# Allegro board XR871_EVB_MAIN_BRD_V1_1-20170606.brd
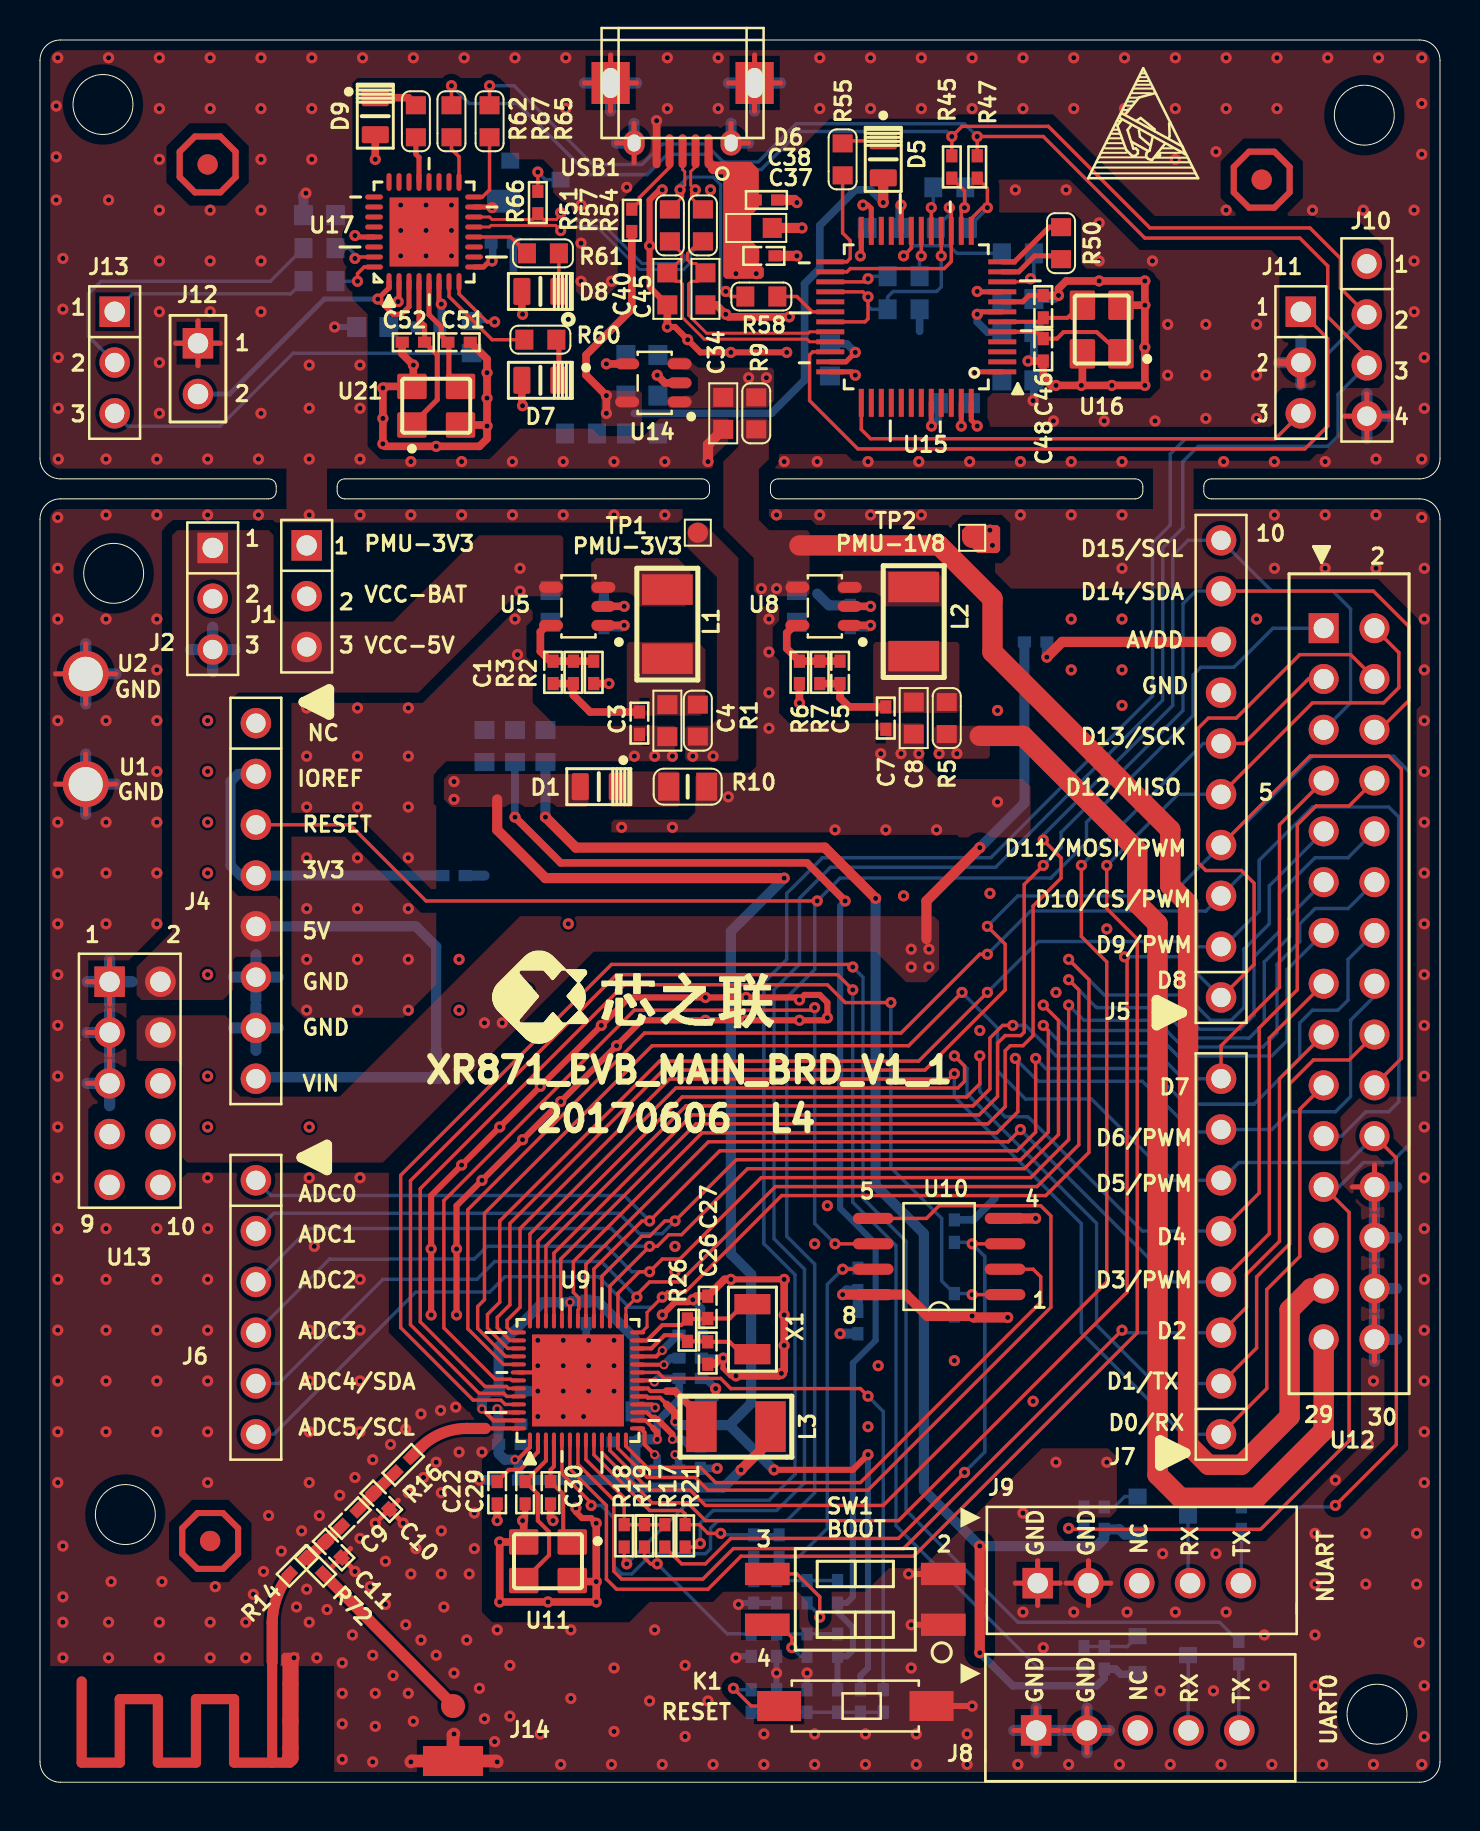
[diagram p0: board, top side]
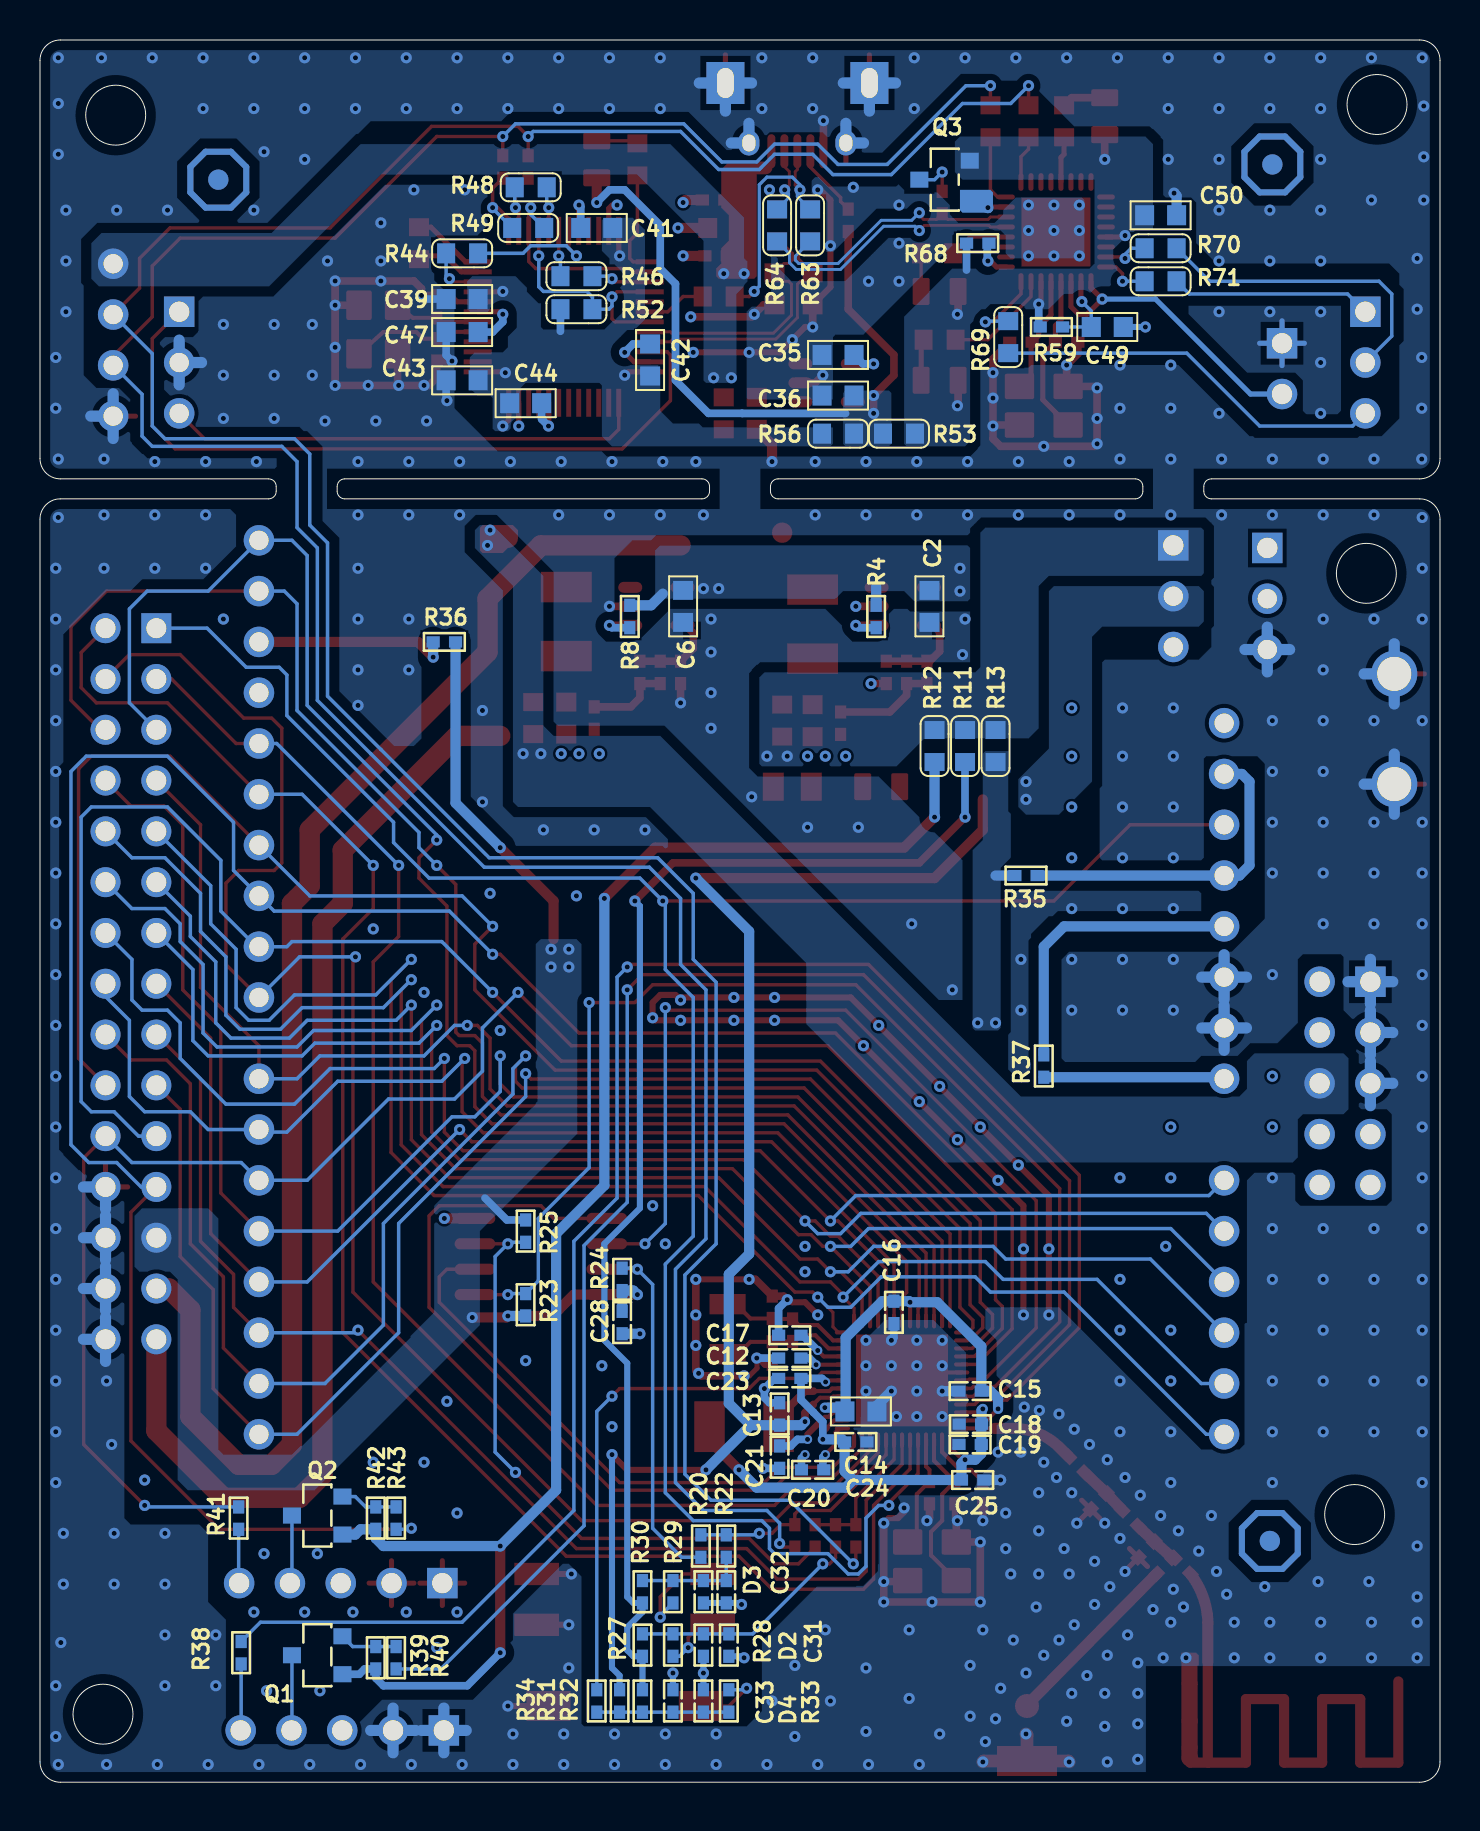
[diagram p1: board, bottom side, seen from below]

Outline 70 x 87.12 mm; copper layers: TOP, GND02, POWER03, BOTTOM. Coordinates in mm from the lower left corner of the outline.
Outline path: circle c3.15,83.9 r1.5 ; circle c3.68,60.45 r1.5 ; circle c4.27,13.39 r1.5 ; circle c66.22,83.36 r1.5 ; circle c66.85,3.4 r1.5 ; 0,86.11 arc(0.3,86.82) 1.02,87.12 68.99,87.12 arc(69.7,86.82) 70,86.11 70,66.19 arc(69.7,65.47) 68.99,65.18 58.57,65.18 arc(58.3,65.06) 58.19,64.8 58.19,64.56 arc(58.3,64.29) 58.57,64.18 68.99,64.18 arc(69.7,63.88) 70,63.16 70,1.02 arc(69.7,0.3) 68.99,0 1.02,0 arc(0.3,0.3) 0,1.02 0,63.16 arc(0.3,63.88) 1.02,64.18 11.43,64.18 arc(11.7,64.29) 11.81,64.56 11.81,64.8 arc(11.7,65.06) 11.43,65.18 1.02,65.18 arc(0.3,65.47) 0,66.19 0,86.11 ; 14.86,64.8 arc(14.97,65.06) 15.24,65.18 33.1,65.18 arc(33.37,65.06) 33.48,64.8 33.48,64.56 arc(33.37,64.29) 33.1,64.18 15.24,64.18 arc(14.97,64.29) 14.86,64.56 14.86,64.8 ; 36.53,64.8 36.53,64.56 arc(36.64,64.29) 36.91,64.18 54.76,64.18 arc(55.03,64.29) 55.14,64.56 55.14,64.8 arc(55.03,65.06) 54.76,65.18 36.91,65.18 arc(36.64,65.06) 36.53,64.8

## Design rules (mm)
net group DIFFPAIR0: nets DUSBD+ DUSBD-
net group DIFFPAIR1: nets USBD+ USBD-
net group DIFFPAIR2: nets N16821081 N16821084

## Placement (name value [footprint] x y rotation side)
C1  47pF  [C0402]  25.65 55.5 90 top
C2  10uF  [C0603]  25.53 58.8 270 bottom
C3  104  [C0402]  29.97 52.96 270 top
C4  10uF  [C0603]  31.37 53.09 270 top
C5  47pF  [C0402]  40.01 55.5 90 top
C6  10uF  [C0603]  37.85 58.8 270 bottom
C7  104  [C0402]  42.29 53.21 270 top
C8  10uF  [C0603]  43.69 53.21 270 top
C9  0R  [C0402]  15.49 13.21 225 top
C10  NC  [C0402]  17.07 14.05 135 top
C11  NC  [C0402]  14.68 11.63 135 top
C12  4.7uF  [C0402]  32.51 21.21 180 bottom
C13  4.7uF  [C0402]  33.02 18.41 90 bottom
C14  10uF  [C0603]  28.96 18.54 180 bottom
C15  104  [C0402]  23.5 19.56 180 bottom
C16  104  [C0402]  27.3 23.5 270 bottom
C17  1uF  [C0402]  32.51 22.35 180 bottom
C18  104  [C0402]  23.48 17.91 180 bottom
C19  104  [C0402]  23.5 16.89 180 bottom
C20  4.7uF  [C0402]  31.37 15.62 180 bottom
C21  4.7uF  [C0402]  33.02 16.26 90 bottom
C22  1uF  [C0402]  22.86 14.48 90 top
C23  4.7uF  [C0402]  32.51 20.19 0 bottom
C24  NC-4.7uF  [C0402]  29.21 17.02 0 bottom
C25  NC-22pF  [C0402]  23.37 15.11 0 bottom
C26  18pF  [C0402]  33.39 23.75 90 top
C27  18pF  [C0402]  33.39 21.46 270 top
C28  104  [C0402]  40.89 22.99 270 bottom
C29  10pF  [C0402]  24.26 14.48 90 top
C30  10pF  [C0402]  25.53 14.48 270 top
C31  104  [C0402]  35.56 6.86 90 bottom
C32  104  [C0402]  35.69 9.53 90 bottom
C33  104  [C0402]  38.35 4.06 270 bottom
C34  105  [C0603]  34.16 68.45 270 top
C35  104  [C0603]  30.1 71.37 0 bottom
C36  105  [C0603]  30.1 69.34 0 bottom
C37  104  [C0402]  36.2 76.33 180 top
C38  10uF  [C0603]  35.81 77.72 180 top
C39  104  [C0603]  48.9 74.17 0 bottom
C40  NC-22p  [C0603]  31.37 74.68 270 top
C41  104  [C0603]  42.16 77.72 0 bottom
C42  104  [C0603]  39.5 71.12 90 bottom
C43  104  [C0603]  48.9 70.1 0 bottom
C44  104  [C0603]  45.72 68.96 180 bottom
C45  NC-22p  [C0603]  33.27 74.68 90 top
C46  10pF  [C0402]  50.16 73.79 270 top
C47  104  [C0603]  48.9 72.52 0 bottom
C48  10pF  [C0402]  50.16 71.63 270 top
C49  100nF  [C0603]  16.64 72.77 180 bottom
C50  105  [C0603]  13.97 78.36 180 bottom
C51  10pF  [C0402]  20.95 72.01 180 top
C52  10pF  [C0402]  18.67 72.01 180 top
D1  RED  [LED0805]  27.94 49.78 180 top
D2  ESD9B5VL-2/TR  [C0402]  36.83 6.86 270 bottom
D3  ESD9B5VL-2/TR  [C0402]  36.83 9.53 270 bottom
D4  ESD9B5VL-2/TR  [C0402]  36.83 4.06 90 bottom
D5  RED  [LED0805]  42.16 81.15 270 top
D6  AU0511P1  [R0402]  36.32 79.12 0 top
D7  RED  [LED0805]  25.02 70.1 180 top
D8  RED  [LED0805]  25.02 74.55 180 top
D9  RED  [LED0805]  16.76 83.31 270 top
J1  VCC-5V  [SIP-3]  13.34 59.31 0 top
J2  SIP3  [SIP-3]  8.64 59.18 0 top
J4  CON8  [SIP-8]  10.79 42.8 0 top
J5  CON10  [SIP-10]  59.05 58.29 180 top
J6  CON6  [SIP-6]  10.79 11.05 0 top
J7  CON8  [SIP-8]  59.05 27.56 180 top
J8  -  [CON5]  59.97 2.59 180 top
J9  -  [CON5]  60.05 9.96 180 top
J10  SWOUT  [SIP-4]  66.34 73.39 0 top
J11  SWD  [SIP-3]  63.04 70.99 0 top
J12  -  [SIP-2]  7.9 70.69 0 top
J13  TGT  [SIP-3]  3.73 70.99 0 top
J14  ANT  [ANT2]  20.65 2.31 0 top
K1  -  [KEY-2]  36.32 3.81 270 top
L1  2.2uH-1.5A DCR<0.1R  [CD32]  31.37 57.91 90 top
L2  2.2uH-1.5A DCR<0.1R  [CD32]  43.69 58.04 90 top
L3  3.3uH-1.0A DCR<0.2R  [CD32]  34.8 17.78 180 top
NOREF  -  [unnamed]  8.51 12.06 0 top
NOREF#2  -  [#2]  67.39 82.43 0 top
NOREF#3  -  [#2]  -7 2 0 top
NOREF#4  -  [#2]  3.17 60.33 0 top
NOREF#5  -  [#2]  4.83 13.59 0 top
NOREF#6  -  [unnamed]  61.09 80.14 0 top
NOREF#7  -  [unnamed]  8.38 80.9 0 top
NOREF#8  -  [#2]  2.57 82.52 0 top
NOREF#9  -  [#2]  66.93 3.3 0 top
NOREF#10  -  [#2]  0 74.5 0 top
NOREF#11  -  [#2]  3.68 0 90 top
NOREF#12  -  [unnamed]  8.51 12.06 180 bottom
NOREF#13  -  [unnamed]  61.09 80.14 180 bottom
NOREF#14  -  [unnamed]  8.38 80.9 180 bottom
Q1  BSN20  [SOT-23]  56.13 6.35 0 bottom
Q2  BSN20  [SOT-23]  56.13 13.34 0 bottom
Q3  BSS84  [SOT-23]  24.77 80.14 0 bottom
R1  0R  [R0603]  32.89 53.09 270 top
R2  22K-1%  [R0402]  27.69 55.5 270 top
R3  100K-1%  [R0402]  26.67 55.5 90 top
R4  100K  [R0402]  28.19 58.29 270 bottom
R5  0R  [R0603]  45.34 53.21 270 top
R6  10K-1%  [R0402]  37.97 55.5 270 top
R7  20K-1%  [R0402]  38.99 55.5 90 top
R8  100K  [R0402]  40.51 58.29 270 bottom
R9  0R  [R0603]  35.81 68.45 270 top
R10  1.5K  [R0805]  32.38 49.78 180 top
R11  0R  [R0603]  23.75 51.82 270 bottom
R12  0R  [R0603]  25.27 51.82 270 bottom
R13  0R  [R0603]  22.23 51.82 270 bottom
R14  0R  [R0402]  12.88 10.82 225 top
R16  0R-NC  [R0402]  18.16 15.88 225 top
R17  0R-NC  [R0402]  31.24 12.32 270 top
R18  NC-0R  [R0402]  29.21 12.32 270 top
R19  0R  [R0402]  30.23 12.32 270 top
R20  0R-NC  [R0402]  36.96 11.81 270 bottom
R21  NC-0R  [R0402]  32.26 12.32 270 top
R22  0R  [R0402]  35.69 11.81 270 bottom
R23  10K  [R0402]  45.72 23.88 270 bottom
R24  10K  [R0402]  40.89 25.15 270 bottom
R25  10K  [R0402]  45.72 27.56 90 bottom
R26  NC-10M  [R0402]  32.37 22.61 90 top
R27  10K  [R0402]  39.88 6.86 90 bottom
R28  0R  [R0402]  38.35 6.86 270 bottom
R29  0R  [R0402]  38.35 9.53 90 bottom
R30  10K  [R0402]  39.88 9.53 270 bottom
R31  10K  [R0402]  41.02 4.06 270 bottom
R32  NC-10K  [R0402]  39.88 4.06 270 bottom
R33  0R  [R0402]  35.56 4.06 90 bottom
R34  0R-NC  [R0402]  42.16 4.06 270 bottom
R35  0R  [R0402]  20.7 45.34 0 bottom
R36  0R  [R0402]  49.78 57.02 180 bottom
R37  0R  [R0402]  19.81 35.81 90 bottom
R38  0R  [R0402]  59.94 6.48 270 bottom
R39  10K  [R0402]  53.21 6.22 90 bottom
R40  0R  [R0402]  52.2 6.22 90 bottom
R41  0R  [R0402]  60.07 13.21 270 bottom
R42  10K  [R0402]  53.21 13.21 90 bottom
R43  0R  [R0402]  52.2 13.21 90 bottom
R44  100R  [R0603]  48.9 76.45 0 bottom
R45  0R-NC  [R0402]  45.59 80.77 270 top
R46  100R  [R0603]  43.18 75.31 180 bottom
R47  0R-NC  [R0402]  46.86 80.77 270 top
R48  100R  [R0603]  45.47 79.76 180 bottom
R49  100R  [R0603]  45.59 77.72 180 bottom
R50  100R  [R0603]  51.05 76.96 270 top
R51  47K  [R0402]  29.59 78.11 270 top
R52  10K  [R0603]  43.18 73.66 0 bottom
R53  NC-0R  [R0603]  27.05 67.44 180 bottom
R54  22R  [R0603]  33.15 77.85 270 top
R55  1K  [R0603]  40.13 81.15 90 top
R56  0R-NC  [R0603]  30.1 67.44 0 bottom
R57  22R  [R0603]  31.5 77.85 270 top
R58  1K5  [R0603]  36.07 74.3 0 top
R59  10K  [R0402]  19.43 72.77 180 bottom
R60  1K  [R0603]  25.02 72.14 0 top
R61  1K  [R0603]  25.15 76.45 0 top
R62  1K  [R0603]  18.8 83.06 90 top
R63  NC-33R  [R0603]  31.5 77.85 270 bottom
R64  NC-33R  [R0603]  33.15 77.85 270 bottom
R65  NC-470  [R0603]  22.48 83.06 90 top
R66  1K5  [R0402]  24.89 78.99 90 top
R67  NC-470  [R0603]  20.57 83.06 90 top
R68  10K  [R0402]  23.11 76.96 0 bottom
R69  470  [R0603]  21.59 72.26 270 bottom
R70  470  [R0603]  13.97 76.71 180 bottom
R71  470  [R0603]  13.97 75.06 180 bottom
R72  NC-0R  [R0402]  13.77 10.82 315 top
SW1  SW DIP-2/SM  [DIP-2]  40.77 9.14 90 top
TP1  PMU-3V3  [TP_SMD]  32.89 62.48 180 top
TP2  PMU-1V8  [TP_SMD]  46.61 62.23 180 top
U1  GND  [TP2_3D1_7]  2.29 49.91 270 top
U2  GND  [TP2_3D1_7]  2.29 55.42 270 top
U5  SY8088  [SOT23-5]  26.92 58.8 180 top
U8  SY8088  [SOT23-5]  39.24 58.8 180 top
U9  XR871  [QFN52P0_4B6X6_NOSOCKET]  26.9 20.09 0 top
U10  PN25F16BSSIUG  [SOIC-8]  44.96 26.29 180 top
U11  24MHz-SMD322526HHFM1F  [CRY-TSX3225]  25.4 11.05 270 top
U12  DIP-30  [IDC-30]  65.46 39.93 270 top
U13  DIP-10  [IDC-10]  4.75 34.95 0 top
U14  RT9193  [SOT23-5]  30.73 69.98 180 top
U15  STM32F103C8  [LQFP48_N]  43.81 73.28 90 top
U16  8M-20pF-10PPM  [CRY-TSX3225]  53.09 72.64 180 top
U17  LPC11U35  [QFN33P0_5B5X5]  19.2 77.52 0 top
U21  12M-20pF-10PPM  [CRY-TSX3225]  19.81 68.83 90 top
USB1  MIRCO-USB-5P  [USB5P0_65B7_20X9_40H2_80]  32.13 84.97 180 top
X1  32768_FC-135  [XATL-FC-135]  35.62 22.66 90 top

## Library data of the parts
C1 C3 C5 C7 = CAPACITOR_1
C2 C4 C6 C8 = CAPACITOR_3
C9-C17 C20-C23 C28 C30 C37 C38 C48 C52 = CAPACITOR
C18 C19 C24-C27 C29 C31-C33 C46 C51 = CAPACITOR_0
C34-C36 C39-C45 C47 C49 C50 = CAP NP
D1 D5 D7-D9 = LED_2: User Part Number: LED0805; Tolerance: RichardLC
D2-D4 D6 = 1_1.5KE100A
J1 = JUMPER-3
J2 = SIP3_1
J4 = CON8_1
J5 = CON10_0
J6 = CON6_2
J7 = CON8_0
J8 J9 = CON2_2
J10 = SIP4
J11 J13 = SWOUT
J12 = SIP-2
J14 = ANT_0
K1 = KEY-2
L1-L3 = INDUCTOR
Q1 Q2 = NMOS_xp151_SOT23
Q3 = PMOS_0
R1-R10 R14 R16 R23-R26 R51 R72 = R
R11-R13 R53 R56 = R1_0805
R17-R22 R35-R43 R45 R47 R59 R66 R68 = R1_0805: room: DRAM
R27-R34 = R1 0805
R44 R46 R48-R50 R52 R54 R55 R57 R58 R60-R65 R67 R69-R71 = RESISTOR/SM
SW1 = SW DIP-2/SM
TP1 TP2 = TEST POINT SURFACE
U1 U2 = Power-Circle
U5 U8 = RT9293B_0
U9 = AW1735_1
U10 = SPI-NOR-SO8
U11 U16 U21 = Crystal4Pin_0
U12 = DIP-30
U13 = DIP-10
U14 = RT9193X_5P
U15 = STM32F103_48P
U17 = LPC11U35_2
USB1 = USB_MINI_SOCKET_2
X1 = CRYSTAL_32.768K_FC-135

## Footprints (pads in the part's own frame, mm; a bottom-side part is the same pattern mirrored in y, then rotated)
ANT2
  round 1.2 smd: 1(0,1.5)
  rect 3x1.5 smd: 2(0,-1.25)
C0402
  rect 0.66x0.56 smd: 1(-0.56,0) 2(0.56,0)
C0603
  rect 0.95x1 smd: 1(-0.8,0) 2(0.8,0)
CD32
  rect 1.524x2.54 smd: 1(-1.727,0) 2(1.727,0)
CON5
  rect 1.524x1.524 hole 1.016: 1(10.16,0)
  round 1.524 hole 1.016: 2(7.62,0) 3(5.08,0) 4(2.54,0) 5(0,0)
CRY-TSX3225
  custom 1.27x1.47 smd: 1(-0.965,1.215) 2(-0.965,-1.215) 3(0.965,-1.215) 4(0.965,1.215)
DIP-2
  rect 1.118x2.235 smd: 1(-1.27,-4.4) 2(1.27,-4.4) 3(1.27,4.4) 4(-1.27,4.4)
IDC-10
  rect 1.524x1.524 hole 1.016: 1(-1.27,5.08)
  round 1.524 hole 1.016: 2(1.27,5.08) 3(-1.27,2.54) 4(1.27,2.54) 5(-1.27,0) 6(1.27,0) 7(-1.27,-2.54) 8(1.27,-2.54) 9(-1.27,-5.08) 10(1.27,-5.08)
IDC-30
  rect 1.5x1.5 hole 1: 1(-17.78,-1.27)
  round 1.5 hole 1: 2(-17.78,1.27) 3(-15.24,-1.27) 4(-15.24,1.27) 5(-12.7,-1.27) 6(-12.7,1.27) 7(-10.16,-1.27) 8(-10.16,1.27) 9(-7.62,-1.27) 10(-7.62,1.27) 11(-5.08,-1.27) 12(-5.08,1.27) 13(-2.54,-1.27) 14(-2.54,1.27) 15(0,-1.27) 16(0,1.27) 17(2.54,-1.27) 18(2.54,1.27) 19(5.08,-1.27) 20(5.08,1.27) 21(7.62,-1.27) 22(7.62,1.27) 23(10.16,-1.27) 24(10.16,1.27) 25(12.7,-1.27) 26(12.7,1.27) 27(15.24,-1.27) 28(15.24,1.27) 29(17.78,-1.27) 30(17.78,1.27)
KEY-2
  rect 1.501x2.2 smd: 1(0,8.255) 2(0,0.635)
LED0805
  custom 0.85x1.35 smd: A(0.925,0) C(-0.925,0)
LQFP48_N
  rect 0.25x1.4 smd: 1(-2.75,-4.3) 2(-2.25,-4.3) 3(-1.75,-4.3) 4(-1.25,-4.3) 5(-0.75,-4.3) 6(-0.25,-4.3) 7(0.25,-4.3) 8(0.75,-4.3) 9(1.25,-4.3) 10(1.75,-4.3) 11(2.25,-4.3) 12(2.75,-4.3) 25(2.75,4.3) 26(2.25,4.3) 27(1.75,4.3) 28(1.25,4.3) 29(0.75,4.3) 30(0.25,4.3) 31(-0.25,4.3) 32(-0.75,4.3) 33(-1.25,4.3) 34(-1.75,4.3) 35(-2.25,4.3) 36(-2.75,4.3)
  rect 1.4x0.25 smd: 13(4.3,-2.75) 14(4.3,-2.25) 15(4.3,-1.75) 16(4.3,-1.25) 17(4.3,-0.75) 18(4.3,-0.25) 19(4.3,0.25) 20(4.3,0.75) 21(4.3,1.25) 22(4.3,1.75) 23(4.3,2.25) 24(4.3,2.75) 37(-4.3,2.75) 38(-4.3,2.25) 39(-4.3,1.75) 40(-4.3,1.25) 41(-4.3,0.75) 42(-4.3,0.25) 43(-4.3,-0.25) 44(-4.3,-0.75) 45(-4.3,-1.25) 46(-4.3,-1.75) 47(-4.3,-2.25) 48(-4.3,-2.75)
QFN33P0_5B5X5
  oval 0.254x0.889 smd: 1(-1.75,-2.5) 2(-1.25,-2.5) 3(-0.75,-2.5) 4(-0.25,-2.5) 5(0.25,-2.5) 6(0.75,-2.5) 7(1.25,-2.5) 8(1.75,-2.5) 17(1.75,2.5) 18(1.25,2.5) 19(0.75,2.5) 20(0.25,2.5) 21(-0.25,2.5) 22(-0.75,2.5) 23(-1.25,2.5) 24(-1.75,2.5)
  oval 0.889x0.254 smd: 9(2.5,-1.75) 10(2.5,-1.25) 11(2.5,-0.75) 12(2.5,-0.25) 13(2.5,0.25) 14(2.5,0.75) 15(2.5,1.25) 16(2.5,1.75) 25(-2.5,1.75) 26(-2.5,1.25) 27(-2.5,0.75) 28(-2.5,0.25) 29(-2.5,-0.25) 30(-2.5,-0.75) 31(-2.5,-1.25) 32(-2.5,-1.75)
  rect 3.45x3.45 smd: 33(0,0)
QFN52P0_4B6X6_NOSOCKET
  oval 0.203x0.762 smd: 1(-2.4,-2.981) 2(-2,-2.981) 3(-1.6,-2.981) 4(-1.2,-2.981) 5(-0.8,-2.981) 6(-0.4,-2.981) 7(0,-2.981) 8(0.4,-2.981) 9(0.8,-2.981) 10(1.2,-2.981) 11(1.6,-2.981) 12(2,-2.981) 13(2.4,-2.981) 27(2.4,2.981) 28(2,2.981) 29(1.6,2.981) 30(1.2,2.981) 31(0.8,2.981) 32(0.4,2.981) 33(0,2.981) 34(-0.4,2.981) 35(-0.8,2.981) 36(-1.2,2.981) 37(-1.6,2.981) 38(-2,2.981) 39(-2.4,2.981)
  oval 0.762x0.203 smd: 14(2.981,-2.4) 15(2.981,-2) 16(2.981,-1.6) 17(2.981,-1.2) 18(2.981,-0.8) 19(2.981,-0.4) 20(2.981,0) 21(2.981,0.4) 22(2.981,0.8) 23(2.981,1.2) 24(2.981,1.6) 25(2.981,2) 26(2.981,2.4) 40(-2.981,2.4) 41(-2.981,2) 42(-2.981,1.6) 43(-2.981,1.2) 44(-2.981,0.8) 45(-2.981,0.4) 46(-2.981,0) 47(-2.981,-0.4) 48(-2.981,-0.8) 49(-2.981,-1.2) 50(-2.981,-1.6) 51(-2.981,-2) 52(-2.981,-2.4)
  rect 4.597x4.597 smd: 53(0,0)
R0402
  rect 0.66x0.56 smd: 1(-0.56,0) 2(0.56,0)
R0603
  rect 0.9x1 smd: 1(-0.8,0) 2(0.8,0)
R0805
  rect 1.05x1.4 smd: 1(-0.95,0) 2(0.95,0)
SIP-2
  rect 1.524x1.524 hole 1.016: 1(0,1.27)
  round 1.524 hole 1.016: 2(0,-1.27)
SIP-3
  rect 1.524x1.524 hole 1.016: 1(0,2.54)
  round 1.524 hole 0.965: 2(0,0) 3(0,-2.54)
SIP-4
  round 1.524 hole 0.965: 1(0,2.54) 2(0,0) 3(0,-2.54) 4(0,-5.08)
SIP-6
  round 1.524 hole 0.965: 1(0,19.05) 2(0,16.51) 3(0,13.97) 4(0,11.43) 5(0,8.89) 6(0,6.35)
SIP-8
  round 1.524 hole 0.965: 1(0,10.16) 2(0,7.62) 3(0,5.08) 4(0,2.54) 5(0,0) 6(0,-2.54) 7(0,-5.08) 8(0,-7.62)
SIP-10
  round 1.524 hole 0.965: 1(0,19.05) 2(0,16.51) 3(0,13.97) 4(0,11.43) 5(0,8.89) 6(0,6.35) 7(0,3.81) 8(0,1.27) 9(0,-1.27) 10(0,-3.81)
SOIC-8
  oval 2.032x0.559 smd: 1(-3.296,1.905) 2(-3.296,0.635) 3(-3.296,-0.635) 4(-3.296,-1.905) 5(3.296,-1.905) 6(3.296,-0.635) 7(3.296,0.635) 8(3.296,1.905)
SOT23-5
  oval 1.2x0.55 smd: 1(-1.246,0.95) 2(-1.246,0) 3(-1.246,-0.95) 4(1.373,-0.95) 5(1.373,0.95)
SOT-23
  rect 0.9x0.8 smd: 1(-1.254,0.95) 2(-1.254,-0.95) 3(1.27,0)
TP2_3D1_7
  round 2.3 hole 1.7: 1(0,0)
TP_SMD
  round 1.016 smd: 1(0,0)
unnamed
  round 1.016 smd: 1(0,0)
USB5P0_65B7_20X9_40H2_80
  oval 0.4x1.7 smd: 1(-1.3,3.412) 2(-0.65,3.412) 3(0,3.412) 4(0.65,3.412) 5(1.3,3.412)
  oval 1.05x1.25 hole 0.65x0.85: 6(2.425,3) 9(-2.425,3)
  rect 1.9x2.1 hole 0.83x1.5: 7(3.6,0) 8(-3.6,0)
XATL-FC-135
  rect 1.016x1.803 smd: 1(-1.25,0) 2(1.25,0)

## Nets
VCC3V3: C36.1 D5.A(ANODE) R51.2 R53.1 R56.1 U14.5(VOUT)
VCC-3V3: C28.1 R13.2 R23.2 R24.2 R25.2 R35.2 R36.2 U10.8(VCC) U12.25 U13.4
VCC-5V: C2.1 C6.1 J1.3 J2.1 J4.5 R4.1 R8.1 R9.2 R37.2 U5.4(IN) U8.4(IN) U12.27 U13.2
VCC-BAT: C13.1 D1.A(ANODE) J1.2 R31.1 U9.18(VCC)
VCC-IO: Q1.1(GATE) Q2.1(GATE) R12.2 R39.1 R42.1
VCC-KEY: R11.2 R27.1 R30.2 R32.1
VDD: J5.8 R36.1
VDD12-CLK: C22.2 U9.2(VDD12_CLK)
VDD12-DIG: C21.2 U9.16(VDD12_DIG)
VDD12-SRAM: C20.2 U9.14(VDD12_SRAM)
VDD14-DIG: C18.2 C19.2 C23.1 C24.2 C25.2 L3.1 U9.1(VDD14_RX) U9.15(VDD14_DIG) U9.20(VDD_SENSE) U9.50(VDD14_TX)
VDD25-EF: C12.2 U9.22(VDD25_EF)
VDD-IO: C14.1 C15.2 C16.1 U9.17(VDD_3V3) U9.34(VDD_IO) U9.51(VDD33_PA)
VDD-RTC: C17.2 U9.23(VDD_RTC)
ANT: C9.1 C10.2 R16.2
BL0: C31.2 D2.1(ANODE) R19.2 R27.2 R28.1
BL1: C32.2 D3.1(ANODE) R22.2 R29.2 R30.1
CHIP-PWD: R34.1 U9.21(CHIP_PWD)
DIG: C2.2 C3.2 C4.2 C6.2 C7.2 C8.2 C10.1 C11.1 C12.1 C13.2 C14.2 C15.1 C16.2 C17.1 C18.1 C19.1 C20.1 C21.1 C22.1 C23.2 C24.1 C25.1 C26.2 C27.2 C28.2 C29.1 C30.2 C31.1 C32.1 C33.1 C34.2 C35.2 C36.2 C37.1 C38.1 C39.2 C40.2 C41.2 C42.2 C43.2 C44.2 C45.1 C46.1 C47.2 C48.2 C49.2 C50.2 C51.1 C52.2 D2.2(CATHODE) D3.2(CATHODE) D4.2(CATHODE) D6.2(CATHODE) J2.3 J4.6 J4.7 J5.7 J8.1 J8.2 J9.1 J9.2 J10.4 J11.2 J12.1 J14.2 K1.1 R2.2 R6.2 R10.1 SW1.1(A1) SW1.2(A2) U1.1 U2.1 U5.2(GND) U8.2(GND) U9.45(TEST) U9.53(EPAD) U10.4(VSS) U11.2 U11.4(5) U12.24 U12.26 U12.28 U12.30 U13.1 U13.3 U13.5 U14.2(GND) U15.8(VSSA) U15.20(PB2/BOOT1) U15.23(VSS_1) U15.35(VSS_2) U15.44(BOOT0) U15.47(VSS_3) U16.2 U16.4(5) U17.33(VSS) U21.2 U21.4(5) USB1.5(GND) USB1.6 USB1.7 USB1.8 USB1.9
DL_3V3: C50.1 D7.A(ANODE) D8.A(ANODE) D9.A(ANODE) Q3.2(SOURCE) R53.2 R59.1 R68.2 U17.6(VDD1) U17.29(VDD2)
DUSBD+: R57.1 R58.1 R63.1 USB1.3(D+)
DUSBD-: R54.1 R64.1 USB1.2(D-)
HXTAL1: C30.1 U9.4(HXTAL1) U11.1
HXTAL2: C29.2 U9.3(HXTAL2) U11.3
JL-3V3: C39.1 C41.1 C42.1 C43.1 C44.1 R52.2 R56.2 U15.1(VBAT) U15.9(VDDA) U15.24(VDD_1) U15.36(VDD_2) U15.48(VDD_3)
JTCK: J11.3 U15.37(PA14/JTCK/SWCLK)
JTMS: J11.1 U15.34(PA13/JTMS/SWDIO)
LED: R55.1 U15.25(PB12/TIM1_BKIN)
LXTAL1: C26.1 R26.2 U9.25(LXTAL1) X1.2
LXTAL2: C27.1 R26.1 U9.24(LXTAL2) X1.1
NRST: C47.1 U15.7(NRST)
OSC1-IN: C48.1 U15.5(PD0-OSC_IN) U16.1
OSC1-OUT: C46.2 U15.6(PD1-OSC_OUT/CANTX) U16.3
OSC2-IN: C52.1 U17.4(XTALIN) U21.1
OSC2-OUT: C51.2 U17.5(XTALOUT) U21.3
PA0: J4.3 U9.5(PA0) U12.1
PA1: J5.5 U9.6(PA1) U12.2
PA2: J5.6 U9.11(PA2) U12.3
PA3: J5.1 U9.10(PA3) U12.4
PA4: J5.10 U9.35(PA4) U12.5
PA5: J5.9 U9.36(PA5) U12.6
PA6: J7.8 U9.37(PA6) U12.7
PA7: J7.5 U9.38(PA7) U12.8
PA8: J6.6 U9.26(PA8) U12.9
PA9: J6.5 U9.27(PA9) U12.10
PA10: J6.4 U9.28(PA10) U12.11
PA11: J6.3 U9.29(PA11) U12.12
PA12: J6.2 U9.30(PA12) U12.13
PA13: J6.1 U9.31(PA13) U12.14
PA14: J7.4 U9.32(PA14) U12.15
PA15: J7.7 U9.33(PA15) U12.16
PA16: J7.3 U9.7(PA16) U12.17
PA17: J7.2 U9.39(PA17) U12.18
PA18: J7.1 U9.40(PA18) U12.19
PA19: J5.4 U9.41(PA19) U12.20
PA20: J5.2 U9.42(PA20) U12.21
PA21: J7.6 R41.1 U9.43(PA21) U12.22
PA22: J5.3 R43.1 U9.44(PA22) U12.23
PB2: R17.1 R18.1 R19.1 U9.8(PB2)
PB3: R20.1 R21.1 R22.1 U9.9(PB3)
PCBANT: R14.2
PMU-1V8: R5.2 TP2.1(TP) U12.29 U13.6
PMU-3V3: J1.1 R1.2 R11.1 R12.1 R13.1 TP1.1(TP)
SPI0-HOLD: R20.2 R24.1 U10.7(HOLD#)
SPI0-WP: R17.2 R25.1 U10.3(WP#)
SPI0_CLK: U9.46(PB7) U10.6(CLK)
SPI0_CS: R23.1 U9.47(PB6) U10.1(CS#)
SPI0_MISO: U9.13(PB5) U10.2(MISO)
SPI0_MOSI: U9.12(PB4) U10.5(MOSI)
SWD-TCK: J10.3 R21.2 R47.1 R65.2
SWD-TMS: J10.2 R18.2 R45.1 R67.2
TCKIN: R47.2 R49.1 U15.13(PA3/USART2_RX/ADC12_IN3/TIM2_CH)
TCKOUT: R49.2 U15.15(PA5/SPI1_SCK/ADC12_IN5) U15.26(PB13/TIM1_CH1N)
TDIIN: R46.1 U15.18(PB0/ADC12_IN8/TIM3_CH3/TIM1_CH2)
TDIOUT: R46.2 U15.27(PB14/TIM1_CH2N)
TDOIN: R52.1 U15.16(PA6/SPI1_MISO/ADC12_IN6/TIM3_CH) U15.28(PB15/TIM1_CH3N) U15.31(PA10/USART1_RX/TIM1_CH3)
TGT-NRST: J13.3 R69.2
TGT-RX: J13.1 R71.2
TGT-TX: J13.2 R70.2
TMSIN: R45.2 R48.1 U15.14(PA4/SPI1_NSS/USART2_CK/ADC12_IN)
TMSOUT: R48.2 U15.17(PA7/SPI1_MOSI/ADC12_IN7/TIM3_CH)
TRESIN: R50.1 U15.12(PA2/USART2_TX/ADC12_IN2/TIM2_CH)
TRESOUT: R50.2 U15.11(PA1/USART2_RTS/ADC12_IN1/TIM2_C)
TRSTIN: R44.1 U15.19(PB1/ADC12_IN9/TIM3_CH4/TIM1_CH3)
TRSTOUT: R44.2 U15.10(PA0-WKUP/USART2_CTS/ADC12_IN0/T)
UART0-RX: R40.1 U9.48(PB1)
UART0-TX: R38.1 U9.49(PB0)
USB-5V: C34.1 C37.2 C38.2 D6.1(ANODE) J10.1 R9.1 U14.1(VIN) U14.3(EN) USB1.1(VBUS)
USBD+: C40.1 R57.2 U15.33(PA12/USART1_RTS/CANTX/TIM1_ETR/)
USBD-: C45.2 R54.2 U15.32(PA11/USART1_CTS/CANRX/TIM1_CH4/)
N16720597: C1.1 C3.1 C4.1 L1.1 R1.1 R3.1
N16720645: C5.1 C7.1 C8.1 L2.1 R5.1 R7.1
N16720871: C1.2 R2.1 R3.2 U5.5(FB)
N16720921: L1.2 U5.3(LX)
N16720933: R4.2 U5.1(EN)
N16721201: C5.2 R6.1 R7.2 U8.5(FB)
N16721251: L2.2 U8.3(LX)
N16721263: R8.2 U8.1(EN)
N16732180: R16.1 U9.52(ANT)
N16732230: L3.2 U9.19(VDD_VLX)
N16735530: C9.2 C11.2 R14.1 R72.1
N16750147: C33.2 D4.1(ANODE) R31.2 R32.2 R33.1 R34.2
N16750207: K1.2 R33.2
N16754756: Q1.2(SOURCE) R39.2 R40.2
N16754784: J8.4 Q1.3(DRAIN)
N16755023: J8.5 R38.2
N16755772: J4.2 J4.4 R35.1
N16821081: R63.2 R66.1 U17.14(USB_D+)
N16821084: R64.2 U17.13(USB_D-)
N16821135: R68.1 U17.9(USB_VBUS)
N16822643: J12.2 U17.1(NRESET_FB_BL) U17.3(NRESET_FB_ISP)
N16822742: C49.1 R59.2 U17.2(IF_NRESET)
N16822784: D7.C(CATHODE) R60.2
N16822846: D8.C(CATHODE) R61.2
N16822866: D9.C(CATHODE) R62.2
N16822953: R62.1 U17.21(LED_UART)
N16822956: R61.1 U17.12(LED_HID)
N16822961: R60.1 U17.7(LED_MSD)
N16823021: R65.1 U17.16(TGT_SWCLK)
N16823060: R67.1 U17.17(TGT_SEDIO)
N16823099: R69.1 U17.8(TGT_NRESET)
N16823124: R70.1 U17.31(TGT_TX)
N16823133: R71.1 U17.32(TGT_RX)
N16833976: Q3.1(GATE) U17.15(USB_SCON)
N16834461: Q3.3(DRAIN) R66.2
N16843670: R58.2 U15.30(PA9/USART1_TX/TIM1_CH2)
N16843969: D5.C(CATHODE) R55.2
N16844013: C35.1 U14.4(BP)
N16848770: R51.1 USB1.4(ID)
N16863031: Q2.2(SOURCE) R42.2 R43.2
N16863040: J9.4 Q2.3(DRAIN)
N16863055: J9.5 R41.2
N16868566: R28.2 SW1.4(B1)
N16884213: R29.1 SW1.3(B2)
N16897558: J14.1 R72.2
N167529957: J4.8 R37.1
N168124291: D1.C(CATHODE) R10.2

Pads without a net: J2 2; J4 1; J8 3; J9 3; NOREF 1; NOREF#6 1; NOREF#7 1; NOREF#12 1; NOREF#13 1; NOREF#14 1; U13 7 8 9 10; U15 2 3 4 21 22 29 38 39 40 41 42 43 45 46; U17 10 11 18 19 20 22 23 24 25 26 27 28 30

## Via types
v1: diameter 0.559, hole 0.254, TOP to BOTTOM, 699 vias
v2: diameter 0.457, hole 0.254, TOP to BOTTOM, 13 vias

## Routing (per net, layer and track width the routed paths; a pad name or vN(x,y) marks a point on that pad's centre or on a via; arc(x,y) is an arc through that point)
VCC3V3: length 33.1
  TOP w0.381: v1(28.32,68.45) v1(28.32,69.34) 27.3,70.36 27.3,71.37 29.59,73.66 R51.2
  TOP w0.508: D5.A v1(42.16,78.99)
  BOTTOM w0.381: 29.72,68.45 34.89,68.45 34.9,68.45 36.58,68.45 38.23,70.1 38.23,74.93 38.99,75.69 38.99,77.85 40.77,79.63 41.53,79.63 v1(42.16,78.99)
VCC-3V3: length 31.8
  TOP w0.508: 44.32,42.16 44.32,44.07 v1(46.99,46.74) ; v1(40.13,24.38) U10.8 43.31,24.38 44.38,23.32 v1(46.61,23.32) 46.68,23.24 v1(48.39,23.24)
  BOTTOM w0.381: 47.75,29.21 46.66,28.12 R25.2
  BOTTOM w0.508: v1(40.13,24.38) 40.33,24.59 R24.2 C28.1 ; R36.2 49.22,48.97 v1(46.99,46.74) ; R23.2 v1(46.61,23.32) ; R35.2 22.23,45.34
  vias: v1(22.23,37.97) v1(23.11,37.97) v1(43.56,41.66) v1(43.56,40.77) v1(44.45,41.66) v1(44.45,40.77)
VCC-5V: length 88.8
  TOP w1.016: U12.27 63.55,24.69 62.48,23.62 62.48,18.29 60.07,15.88 58.42,15.88 57.4,16.89 57.4,43.94 56.52,44.83 56.52,47.62 47.62,56.52 47.62,59.18 44.96,61.85 37.97,61.85
  BOTTOM w0.508: R8.1 39.44,58.85 38.86,59.44 ; R37.2 19.81,41.78 18.8,42.8 J4.5 ; R4.1 28.19,59.82
  vias: v1(24,60.71) v1(24,59.56) v1(36.07,59.69) v1(36.83,59.69)
VCC-BAT: length 71.7
  TOP w0.203: 31.34,18.89 31,19.23 30.4,19.23 30.33,19.29 U9.18
  TOP w0.305: v1(41.4,16.38) 40.64,15.62 v1(36.7,15.62)
  TOP w0.381: v2(31.75,18.03) 31.75,18.48 31.34,18.89
  TOP w0.508: v1(37.21,45.21) 25.27,45.21 22.86,47.62 22.86,49.15
  BOTTOM w0.305: R31.1 41.02,5.33 41.4,5.72 v1(41.4,16.38)
  BOTTOM w0.508: v2(31.75,18.03) 31.93,17.85 C13.1 34.47,17.85 ; v1(37.21,45.21) 34.54,42.55 34.54,26.42 35.56,25.4 35.56,18.95 34.47,17.85 ; v1(36.7,15.62) 34.47,17.85
  vias: v1(20.7,50.04) v1(20.7,49.15)
VCC-IO: length 78.7
  TOP w0.508: v1(46.99,6.48) v1(46.99,11.81) ; v1(25.27,48.26) 26.8,46.74 39.24,46.74 v1(41.78,44.2)
  BOTTOM w0.381: v1(46.99,6.48) 48.64,4.83 52.83,4.83 53.21,5.21 R39.1 53.77,5.66 54.04,5.4 Q1.1
  BOTTOM w0.508: Q2.1 54.24,12.39 53.98,12.65 R42.1 53.21,12.19 52.83,11.81 v1(46.99,11.81) 44.2,14.61 44.2,27.43 41.78,29.84 v1(41.78,44.2) ; R12.2 v1(25.27,48.26)
VCC-KEY: length 63.2
  TOP w0.381: v1(40.26,44.07) 38.35,45.97 26.04,45.97 v1(23.75,48.26)
  BOTTOM w0.305: R32.1 R27.1 40.34,6.3 40.64,6.6 40.64,7.75 39.88,8.51 R30.2 40.33,8.96 40.64,9.27 40.64,20.95 41.78,22.1 41.78,26.92 40.01,28.7 40.01,43.81 v1(40.26,44.07)
  BOTTOM w0.381: R11.2 v1(23.75,48.26)
VDD: length 9.8
  TOP w0.508: v1(50.34,56.26) 51.11,57.02 59.05,57.02
  BOTTOM w0.508: R36.1 v1(50.34,56.26)
VDD12-CLK: length 3.2
  TOP w0.203: U9.2 24.9,16.52 24,15.62 23.87,15.62 23.87,15.62 23.44,15.62 C22.2
VDD12-DIG: length 4
  TOP w0.203: 30.86,18.16 30.75,18.28 30.57,18.28 30.43,18.41 30.43,18.41 30.35,18.49 U9.16
  TOP w0.305: v2(31.62,17.14) 31.62,17.4 30.86,18.16
  BOTTOM w0.381: C21.2 32.46,16.82 32.13,17.14 v2(31.62,17.14)
VDD12-SRAM: length 2.6
  TOP w0.203: v2(30.73,16.38) 30.23,16.89 30.23,17.49 30.02,17.69 U9.14
  BOTTOM w0.381: v2(30.73,16.38) 30.86,16.26 30.86,15.67 C20.2
VDD14-DIG: length 31.7
  TOP w0.203: v2(22.86,18.67) 23.04,18.49 U9.50 ; v2(23.75,16.13) 23.88,16.13 24.5,16.75 U9.1 ; U9.20 30.65,20.09 v2(30.72,20.02) ; 30.66,17.71 30.28,18.09 U9.15
  TOP w0.305: v2(30.86,17.14) 30.86,17.51 30.66,17.71
  TOP w0.508: v1(35.05,15.62) 36.53,17.09 L3.1
  BOTTOM w0.381: v2(30.72,20.02) 30.9,20.19 C23.1 31.95,19.12 31.33,18.5 31.33,18.5 30.86,18.03 v2(30.86,17.14)
  BOTTOM w0.508: 29.34,15.11 C25.2 23.93,15.95 v2(23.75,16.13) 23.24,16.13 22.93,16.44 C19.2 22.93,17.89 C18.2 22.92,18.61 v2(22.86,18.67) ; 29.34,15.11 29.72,14.73 34.16,14.73 v1(35.05,15.62) ; 29.34,15.11 29.77,15.55 C24.2 29.9,17.14 v2(30.86,17.14)
VDD25-EF: length 2.2
  TOP w0.203: U9.22 29.89,20.88 31.19,20.88 v2(31.2,20.88)
  BOTTOM w0.381: C12.2 31.53,21.21 v2(31.2,20.88)
VDD-IO: length 20.9
  TOP w0.203: v2(22.1,18.67) 22.68,18.09 U9.51 ; U9.17 30.6,18.89 v2(30.76,18.73) ; U9.34 v2(26.5,24)
  BOTTOM w0.508: v2(22.1,18.67) 22.1,19.18 22.48,19.56 C15.2 22.93,21.79 25.15,24 v2(26.5,24) 26.55,24.06 C16.1 27.31,24.05 27.89,24.05 29.72,22.23 29.72,18.58 C14.1 29.95,18.73 v2(30.76,18.73)
VDD-RTC: length 2.5
  TOP w0.203: v2(31.11,21.59) 30.82,21.29 U9.23
  BOTTOM w0.381: C17.2 31.88,22.35 v2(31.11,21.59)
ANT: length 2.7
  TOP w0.559: C9.1 C10.2 17.77,15.48
BL0: length 11.8
  TOP w0.17: v1(30.86,10.92) 30.52,10.92 30.23,11.22 R19.2
  BOTTOM w0.17: R27.2 R28.1 D2.1 C31.2 34.36,7.42 v1(30.86,10.92)
BL1: length 5.4
  BOTTOM w0.17: R30.1 R29.2 D3.1 C32.2 R22.2
CHIP-PWD: length 27
  TOP w0.17: v1(41.4,19.3) 41.02,19.68 34.54,19.68 34.04,20.19 31.2,20.19 30.9,20.49 U9.21
  BOTTOM w0.17: R34.1 42.16,18.54 v1(41.4,19.3)
DIG: length 592.3
  TOP w0.203: v1(24.89,20.83) 24.89,20.69 24.69,20.49 U9.45
  TOP w0.254: 3.48,36.07 U13.5 2.36,34.95 ; 66.73,28.66 U12.24 ; U12.24 66.73,30.87 ; U12.24 65.62,29.77 ; 17.01,13.2 C10.1 ; C10.1 17.91,14.1 ; C10.1 17.95,13.17 ; 49.81,1.47 J8.1 ; J8.1 50.93,2.59 ; J8.1 49.81,3.71 ; J8.1 48.69,2.59 ; 52.43,8.84 J9.2 ; J9.2 53.54,9.96 ; J9.2 51.31,9.96 ; J9.2 52.43,11.07 ; U15.23 41.57,78.7 41.4,78.87 v1(41.15,78.87) ; 0.78,55.42 U2.1 ; U2.1 2.29,56.93 ; U2.1 2.29,53.92 ; U2.1 3.79,55.42 ; U13.3 3.48,38.61 ; U13.3 2.36,37.49 ; U13.3 3.48,36.37 ; 48.77,9.96 J9.1 ; J9.1 49.89,11.07 ; J9.1 49.89,8.84 ; J9.1 51,9.96 ; v1(44.58,67.82) 44.57,67.83 U15.44 ; 34.42,84.97 USB1.8 ; USB1.8 35.73,83.57 ; USB1.8 37.04,84.97 ; USB1.8 35.73,86.38 ; 6.78,71.96 J12.1 ; J12.1 9.02,71.96 ; J12.1 7.9,73.08 ; J12.1 7.9,70.84 ; 66.73,23.58 U12.28 66.73,25.79 ; U1.1 2.29,51.42 ; U1.1 3.79,49.91 ; U1.1 0.78,49.91 ; U1.1 2.29,48.4 ; J8.2 53.47,2.59 ; J8.2 52.35,1.47 ; J8.2 51.23,2.59 ; J8.2 52.35,3.71 ; 66.73,26.12 U12.26 66.73,28.33 ; USB1.7 28.53,86.38 ; USB1.7 28.53,83.57 ; USB1.7 27.22,84.97 ; USB1.7 29.84,84.97 ; U15.47 v1(46.06,67.82) ; USB1.6 29.71,82.95 ; USB1.6 28.82,81.97 ; USB1.6 29.71,80.99 ; U13.1 3.48,41.15 ; U13.1 2.36,40.03 ; U13.1 3.48,38.91 ; 66.73,23.25 U12.30 66.73,21.04 ; J10.4 66.34,69.43 ; J10.4 67.46,68.31 ; J10.4 66.34,67.2 ; J10.4 65.23,68.31 ; 35.44,81.97 USB1.9 34.56,82.95 ; C11.1 15.53,11.69 ; C11.1 15.56,10.75 ; C11.1 14.63,10.79 ; v1(34.8,20.32) 34.53,20.32 34.15,20.7 34.15,21.2 v1(34.16,21.21) ; U15.20 43.06,78.86 v1(43.05,78.87) ; U15.35 40.3,71.03 v1(40.77,71.5) ; C46.1 49.46,74.35 49.14,74.03 U15.8
  TOP w0.305: v1(26.8,13.72) 26.8,13.51 27.1,13.21 27.56,13.21 v1(27.81,12.95) ; v1(31.37,72.77) 31.75,72.77 v1(32.38,72.14) 33.02,71.5 v1(34.54,71.5) v1(37.34,71.5) ; 44.58,3.81 v1(46.61,3.81) ; SW1.1 v1(43.56,7.87) ; C29.1 24.26,13.21 v1(24.13,13.08) ; SW1.2 v1(43.43,10.41) ; v1(32.64,24.13) 32.51,24.13 32.38,24 31.75,24 v1(31.11,23.37) ; C40.2 30.48,74.76 v1(30.48,76.83) 30.48,79.12 30.99,79.63 v1(31.11,79.63) ; v1(19.56,23.37) v1(19.56,26.67) 19.56,29.34 v1(21.08,30.86) v1(22.99,32.77) v1(25.02,34.8) v1(28.07,37.85) 29.46,39.24 v1(33.27,39.24) v1(35.31,39.24) 37.85,39.24 v1(37.97,39.12) 38.23,39.37 38.99,39.37 39.37,38.99 v1(39.37,38.23) 39.24,38.1 v1(37.97,38.1) v1(35.31,38.1) v1(33.27,38.1) 30.1,38.1 v1(28.83,36.83) v1(26.04,34.04) v1(24.13,32.13) v1(22.1,30.1) 20.83,28.83 v1(20.83,26.67) v1(20.83,23.37) ; v1(34.54,25.15) v1(37.21,25.15)
  TOP w0.381: v1(34.54,25.15) 34.23,25.15 C26.2 32.82,24.31 v1(32.64,24.13) ; v1(37.47,73.28) 34.42,73.28 v1(34.29,73.41) 33.82,73.88 C45.1 ; v1(52.07,69.85) v1(50.8,69.85) 50.55,69.85 50.16,70.23 C48.2 v1(49.4,71.07) ; v1(52.07,69.85) 52.12,69.9 U16.4 ; v1(52.07,69.85) v1(53.59,69.85) v1(55.24,69.85) v1(55.24,71.75) v1(55.24,73.86) ; v1(22.35,67.82) 22.35,67.18 21.97,66.8 v1(19.81,66.8) 17.27,66.8 v1(17.14,66.93) v1(17.14,68.2) v1(17.14,69.72) 17.22,69.8 U21.4 18.67,69.87 v1(18.67,70.87) 18.11,71.43 C52.2 ; v1(22.35,67.82) v1(22.35,69.22) v1(22.35,70.48) 22.35,71.17 C51.1 ; v1(22.35,67.82) 22.3,67.87 U21.2 ; R6.2 v1(37.97,53.98) ; v1(34.8,20.32) 36.94,20.32 v1(37.07,20.45) 37.21,20.59 v1(37.21,21.84) v1(37.21,23.37) v1(37.21,25.15) ; USB1.5 v1(30.83,83.09) ; U16.2 v1(55.24,73.86) ; v1(55.24,73.86) v1(55.24,75.07) v1(52.96,75.07) 51.31,75.07 50.93,74.69 v1(50.93,74.35) C46.1 ; 61.92,70.99 J11.2 63.04,69.87 ; R2.2 v1(28.45,54.94) ; U11.4 26.67,10.03 v1(27.81,10.03) ; v1(27.81,10.03) v1(27.81,9.02) v1(25.4,9.02) v1(22.99,9.02) v1(22.99,12.01) U11.2 24.18,13.03 v1(24.13,13.08) ; v1(27.81,10.03) v1(27.81,12.95) ; C22.1 v1(22.86,13.08) ; C27.2 33.73,20.9 34.04,21.21 v1(34.16,21.21) ; U14.2 31.24,69.98 v1(30.86,70.36) ; v1(31.37,72.77) C40.2 ; v1(25.65,13.08) 25.53,13.21 C30.2 ; U5.2 v1(29.21,58.8) ; U8.2 v1(41.53,58.8)
  TOP w0.508: D6.2 37.72,79.12 v1(37.85,78.99) ; C38.1 v1(38.1,77.72) ; C37.1 v1(37.85,76.33) ; U10.4 v1(49.78,28.19) ; C34.2 33.4,66.89 v1(33.4,66.04)
  TOP w0.635: J14.2 22.81,1.06 v1(22.86,1.02) ; J14.2 18.59,1.06 v1(18.54,1.02) ; J14.2 20.65,2.36 v1(20.7,2.41)
  GND02 w0.254: 10.79,39.14 J4.6 ; J4.6 11.91,40.26 ; J4.6 10.79,41.38 ; J4.6 9.68,40.26 ; 35.73,83.57 USB1.8 ; USB1.8 37.04,84.97 ; USB1.8 35.73,86.38 ; USB1.8 34.42,84.97 ; 2.36,37.49 U13.3 ; U13.3 3.48,36.37 ; U13.3 3.48,38.61 ; U13.3 4.6,37.49 ; U12.30 66.73,23.25 ; U12.30 66.73,21.04 ; U12.30 65.62,22.15 ; U12.30 67.83,22.15 ; 7.52,56.64 J2.3 ; J2.3 8.64,57.76 ; J2.3 9.75,56.64 ; J2.3 8.64,55.52 ; 65.62,29.77 U12.24 ; U12.24 67.83,29.77 ; U12.24 66.73,28.66 ; U12.24 66.73,30.87 ; 0.78,49.91 U1.1 ; U1.1 2.29,48.4 ; U1.1 3.79,49.91 ; U1.1 2.29,51.42 ; J12.1 7.9,73.08 ; J12.1 7.9,70.84 ; J12.1 9.02,71.96 ; J12.1 6.78,71.96 ; J11.2 64.16,70.99 ; J11.2 61.92,70.99 ; J11.2 63.04,69.87 ; J11.2 63.04,72.11 ; 2.36,40.03 U13.1 ; U13.1 4.6,40.03 ; U13.1 3.48,41.15 ; U13.1 3.48,38.91 ; 2.36,34.95 U13.5 ; U13.5 4.6,34.95 ; U13.5 3.48,36.07 ; U13.5 3.48,33.83 ; J8.1 50.93,2.59 ; J8.1 49.81,3.71 ; J8.1 49.81,1.47 ; J8.1 48.69,2.59 ; USB1.6 30.59,81.97 ; USB1.6 29.71,82.95 ; USB1.6 29.71,80.99 ; USB1.6 28.82,81.97 ; 51.23,2.59 J8.2 ; J8.2 52.35,1.47 ; J8.2 53.47,2.59 ; J8.2 52.35,3.71 ; U12.28 66.73,25.79 ; U12.28 67.83,24.69 ; U12.28 65.62,24.69 ; U12.28 66.73,23.58 ; J10.4 66.34,69.43 ; J10.4 67.46,68.31 ; J10.4 65.23,68.31 ; J10.4 66.34,67.2 ; 66.73,26.12 U12.26 ; U12.26 66.73,28.33 ; U12.26 67.83,27.23 ; U12.26 65.62,27.23 ; 59.05,53.36 J5.7 ; J5.7 60.17,54.48 ; J5.7 57.94,54.48 ; J5.7 59.05,55.6 ; J9.1 49.89,11.07 ; J9.1 48.77,9.96 ; J9.1 51,9.96 ; J9.1 49.89,8.84 ; 28.53,83.57 USB1.7 ; USB1.7 28.53,86.38 ; USB1.7 29.84,84.97 ; USB1.7 27.22,84.97 ; 51.31,9.96 J9.2 ; J9.2 52.43,8.84 ; J9.2 53.54,9.96 ; J9.2 52.43,11.07 ; J4.7 10.79,38.84 ; J4.7 9.68,37.72 ; J4.7 11.91,37.72 ; J4.7 10.79,36.6 ; 2.29,53.92 U2.1 ; U2.1 3.79,55.42 ; U2.1 0.78,55.42 ; U2.1 2.29,56.93 ; USB1.9 35.44,81.97 ; USB1.9 34.56,82.95 ; USB1.9 33.67,81.97 ; USB1.9 34.56,80.99
  POWER03 w0.254: 9.68,37.72 J4.7 ; J4.7 11.91,37.72 ; J4.7 10.79,36.6 ; J4.7 10.79,38.84 ; 34.56,80.99 USB1.9 ; USB1.9 33.67,81.97 ; USB1.9 35.44,81.97 ; USB1.9 34.56,82.95 ; 63.04,69.87 J11.2 ; J11.2 63.04,72.11 ; J11.2 61.92,70.99 ; J11.2 64.16,70.99 ; J9.1 49.89,11.07 ; J9.1 51,9.96 ; J9.1 49.89,8.84 ; J9.1 48.77,9.96 ; 66.73,26.12 U12.26 ; U12.26 66.73,28.33 ; U12.26 67.83,27.23 ; U12.26 65.62,27.23 ; 10.79,39.14 J4.6 ; J4.6 9.68,40.26 ; J4.6 11.91,40.26 ; J4.6 10.79,41.38 ; J8.1 50.93,2.59 ; J8.1 48.69,2.59 ; J8.1 49.81,1.47 ; J8.1 49.81,3.71 ; 66.73,21.04 U12.30 ; U12.30 65.62,22.15 ; U12.30 67.83,22.15 ; U12.30 66.73,23.25 ; J9.2 52.43,11.07 ; J9.2 53.54,9.96 ; J9.2 51.31,9.96 ; J9.2 52.43,8.84 ; U13.1 3.48,41.15 ; U13.1 2.36,40.03 ; U13.1 4.6,40.03 ; U13.1 3.48,38.91 ; J5.7 59.05,55.6 ; J5.7 60.17,54.48 ; J5.7 59.05,53.36 ; J5.7 57.94,54.48 ; U12.28 67.83,24.69 ; U12.28 66.73,25.79 ; U12.28 66.73,23.58 ; U12.28 65.62,24.69 ; 65.23,68.31 J10.4 ; J10.4 67.46,68.31 ; J10.4 66.34,67.2 ; J10.4 66.34,69.43 ; 6.78,71.96 J12.1 ; J12.1 7.9,73.08 ; J12.1 7.9,70.84 ; J12.1 9.02,71.96 ; U1.1 3.79,49.91 ; U1.1 2.29,48.4 ; U1.1 2.29,51.42 ; U1.1 0.78,49.91 ; 7.52,56.64 J2.3 ; J2.3 8.64,57.76 ; J2.3 9.75,56.64 ; J2.3 8.64,55.52 ; 28.53,83.57 USB1.7 ; USB1.7 28.53,86.38 ; USB1.7 27.22,84.97 ; USB1.7 29.84,84.97 ; U13.5 4.6,34.95 ; U13.5 3.48,33.83 ; U13.5 2.36,34.95 ; U13.5 3.48,36.07 ; U12.24 67.83,29.77 ; U12.24 65.62,29.77 ; U12.24 66.73,30.87 ; U12.24 66.73,28.66 ; USB1.6 29.71,82.95 ; USB1.6 30.59,81.97 ; USB1.6 28.82,81.97 ; USB1.6 29.71,80.99 ; 2.36,37.49 U13.3 ; U13.3 4.6,37.49 ; U13.3 3.48,36.37 ; U13.3 3.48,38.61 ; J8.2 53.47,2.59 ; J8.2 52.35,1.47 ; J8.2 52.35,3.71 ; J8.2 51.23,2.59 ; 34.42,84.97 USB1.8 ; USB1.8 37.04,84.97 ; USB1.8 35.73,83.57 ; USB1.8 35.73,86.38 ; U2.1 3.79,55.42 ; U2.1 0.78,55.42 ; U2.1 2.29,56.93 ; U2.1 2.29,53.92
  BOTTOM w0.254: 6.78,71.96 J12.1 ; J12.1 7.9,73.08 ; J12.1 7.9,70.84 ; J12.1 9.02,71.96
  BOTTOM w0.305: C49.2 v1(14.73,72.77) ; C33.1 v1(38.35,5.46) ; D2.2 v1(36.83,5.46) D4.2 ; v1(34.8,6.22) 34.87,6.3 C31.1 ; v1(34.92,8.89) 35,8.96 C32.1 D3.2
  BOTTOM w0.381: C23.2 33.27,20.19 v1(33.78,19.68) 33.78,19.23 33.53,18.98 C13.2 ; C47.2 49.7,71.36 v1(49.4,71.07) ; v1(34.16,21.21) C12.1 ; v1(27.43,22.1) 27.3,22.23 C16.2 ; C42.2 40.35,71.92 v1(40.77,71.5) ; v2(31.75,16.38) 31.93,16.2 C20.1 ; C41.2 42.96,78.78 v1(43.05,78.87) ; v1(44.58,67.82) 44.92,68.16 C44.2 ; C17.1 33.07,23.7 v1(32.64,24.13) ; C43.2 49.7,69.13 v1(49.66,69.09) ; v1(50.93,74.35) 50.75,74.17 C39.2 ; C21.1 v1(33.86,15.7)
  BOTTOM w0.508: C14.2 28.16,18.83 v1(27.43,19.56) ; C25.1 v1(21.97,15.11) ; C50.2 13.17,79.34 v1(13.3,79.46) ; C28.2 v1(40.01,22.43) ; C15.1 v1(24.89,19.56)
  BOTTOM w0.559: U13.5 3.48,36.07 ; U13.5 3.48,33.83 ; U13.5 2.36,34.95 ; U2.1 3.79,55.42 ; U2.1 2.29,56.93 ; U2.1 2.29,53.92 ; 66.73,21.04 U12.30 ; U12.30 67.83,22.15 ; U12.30 66.73,23.25 ; 51.23,2.59 J8.2 ; J8.2 53.47,2.59 ; J8.2 52.35,3.71 ; J8.2 52.35,1.47 ; U13.3 3.48,38.61 ; U13.3 3.48,36.37 ; U13.3 2.36,37.49 ; 67.83,29.77 U12.24 66.73,28.66 ; USB1.8 37.04,84.97 ; USB1.8 34.42,84.97 ; USB1.8 35.73,83.57 ; USB1.7 29.84,84.97 ; USB1.7 27.22,84.97 ; USB1.7 28.53,83.57 ; J10.4 66.34,69.43 ; J10.4 67.46,68.31 ; J10.4 66.34,67.2 ; U12.28 67.83,24.69 ; U12.28 66.73,25.79 ; U12.28 66.73,23.58 ; 7.52,56.64 J2.3 ; J2.3 8.64,55.52 ; J2.3 8.64,57.76 ; J2.3 9.75,56.64 ; 66.73,26.12 U12.26 ; U12.26 66.73,28.33 ; U12.26 67.83,27.23 ; U13.1 3.48,41.15 ; U13.1 2.36,40.03 ; U13.1 3.48,38.91 ; U13.1 4.6,40.03 ; 49.81,1.47 J8.1 ; J8.1 48.69,2.59 ; J8.1 49.81,3.71 ; J8.1 50.93,2.59 ; J4.7 10.79,38.84 ; J4.7 9.68,37.72 ; J4.7 11.91,37.72 ; J4.7 10.79,36.6 ; J4.6 10.79,41.38 ; J4.6 10.79,39.14 ; J4.6 9.68,40.26 ; J4.6 11.91,40.26 ; 61.92,70.99 J11.2 ; J11.2 63.04,69.87 ; J11.2 63.04,72.11 ; U1.1 3.79,49.91 ; U1.1 2.29,51.42 ; U1.1 2.29,48.4 ; 34.56,82.95 USB1.9 35.44,81.97 ; 29.71,82.95 USB1.6 28.82,81.97
  vias: v1(0.81,83.82) v1(0.81,81.28) v1(0.81,79.12) v1(0.89,86.23) v1(0.91,71.25) v1(0.91,68.71) v1(0.91,66.17) v1(0.89,63.25) v1(0.89,60.71) v1(0.89,58.17) v1(0.89,53.09) v1(0.89,48.01) v1(0.89,45.47) v1(0.89,42.93) v1(0.89,40.39) v1(0.89,37.85) v1(0.89,35.31) v1(0.89,32.77) v1(0.89,30.23) v1(0.89,27.69) v1(0.89,25.15) v1(0.89,22.61) v1(0.89,20.07) v1(0.89,17.53) v1(0.89,14.99) v1(1.14,76.2) v1(1.14,73.66) v1(1.14,11.81) v1(1.14,9.27) v1(1.14,8) v1(1.14,6.22) v1(3.3,66.17) v1(3.3,63.37) v1(3.3,58.17) v1(3.3,53.09) v1(3.3,48.01) v1(3.3,45.47) v1(3.3,42.93) v1(3.3,27.69) v1(3.3,25.15) v1(3.3,22.61) v1(3.3,20.07) v1(3.3,17.53) v1(3.43,86.23) v1(3.43,79.12) v1(3.43,8) v1(3.43,6.22) v1(3.56,10.03) v1(5.84,66.17) v1(5.84,63.37) v1(5.84,58.17) v1(5.84,55.63) v1(5.84,53.09) v1(5.84,50.55) v1(5.84,48.01) v1(5.84,45.47) v1(5.84,42.93) v1(5.84,27.69) v1(5.84,25.15) v1(5.84,22.61) v1(5.84,20.07) v1(5.84,17.53) v1(5.97,86.23) v1(5.97,83.69) v1(5.97,81.15) v1(5.97,78.61) v1(5.97,76.07) v1(5.97,73.53) v1(5.97,70.99) v1(5.97,68.45) v1(5.97,8) v1(5.97,6.22) v1(6.1,10.03) v1(8.38,66.17) v1(8.38,63.37) v1(8.38,53.09) v1(8.38,50.55) v1(8.38,48.01) v1(8.38,45.47) v1(8.38,40.39) v1(8.38,35.31) v1(8.38,32.77) v1(8.38,30.23) v1(8.38,27.69) v1(8.38,25.15) v1(8.38,22.61) v1(8.38,20.07) v1(8.38,17.53) v1(8.38,14.99) v1(8.51,86.23) v1(8.51,83.69) v1(8.51,78.61) v1(8.51,76.07) v1(8.51,73.53) v1(8.51,8) v1(8.51,6.22) v1(8.76,9.78) v1(10.29,8) v1(10.29,6.22) v1(10.67,9.4) v1(10.92,66.17) v1(10.92,63.37) v1(11.05,86.23) v1(11.05,83.69) v1(11.05,81.15) v1(11.05,78.61) v1(11.05,76.07) v1(11.05,73.53) v1(11.05,68.45) v1(11.18,10.54) v1(11.43,13.34) v1(12.06,11.56) v1(12.7,6.22) v1(12.83,8.76) v1(13.08,12.57) v1(13.34,53.72) v1(13.34,51.31) v1(13.34,48.77) v1(13.34,46.23) v1(13.34,43.69) v1(13.34,41.15) v1(13.34,38.61) v1(13.34,9.65) v1(13.46,70.87) v1(13.46,68.71) v1(13.46,66.17) v1(13.46,63.37) v1(13.46,32.77) v1(13.46,30.23) v1(13.46,22.61) v1(13.46,20.07) v1(13.46,17.53) v1(13.46,14.99) v1(13.46,8) v1(13.59,86.23) v1(13.59,83.69) v1(13.59,81.15) v1(13.72,26.8) v1(13.84,6.22) v1(13.97,13.34) v1(14.35,8.64) v1(14.99,14.35) v1(15.11,5.97) v1(15.11,4.45) v1(15.11,2.92) v1(15.11,1.14) v1(15.62,7.37) v1(15.75,15.24) v1(15.75,10.54) v1(15.88,53.72) v1(15.88,51.31) v1(15.88,48.77) v1(15.88,46.23) v1(15.88,43.69) v1(15.88,41.15) v1(15.88,38.61) v1(16,70.87) v1(16,68.71) v1(16,66.17) v1(16,63.37) v1(16,30.23) v1(16,25.15) v1(16,22.61) v1(16,20.07) v1(16,17.53) v1(16,12.19) v1(16.13,86.23) v1(16.51,9.78) v1(16.64,16.13) v1(16.64,6.35) v1(16.64,1.02) v1(16.76,12.95) v1(16.76,4.45) v1(16.76,2.79) v1(17.27,11.05) v1(17.27,8.89) v1(17.53,16.89) v1(17.65,5.33) v1(18.03,78.87) v1(18.03,77.6) v1(18.03,76.33) v1(18.16,12.95) v1(18.29,17.65) v1(18.29,7.87) v1(18.41,53.72) v1(18.41,51.31) v1(18.41,48.77) v1(18.41,46.23) v1(18.41,43.69) v1(18.41,41.15) v1(18.41,38.61) v1(18.41,14.48) v1(18.41,4.45) v1(18.54,66.04) v1(18.54,63.37) v1(18.54,10.41) v1(18.67,86.23) v1(18.67,3.05) v1(18.8,11.68) v1(19.05,18.41) v1(19.05,7.11) v1(19.18,15.24) v1(19.3,78.87) v1(19.3,77.6) v1(19.3,76.33) v1(19.81,16) v1(19.81,6.35) v1(20.03,18.6) v1(20.07,14.48) v1(20.07,12.57) v1(20.07,10.41) v1(20.19,8.76) v1(20.57,78.87) v1(20.57,77.6) v1(20.57,76.33) v1(20.7,5.46) v1(20.79,18.76) v1(20.95,41.15) v1(20.95,38.61) v1(20.95,16.51) v1(21.08,66.04) v1(21.08,63.37) v1(21.21,86.23) v1(21.34,7.11) v1(21.46,10.41) v1(21.72,13.46) v1(21.72,11.68) v1(21.97,4.7) v1(22.1,16.51) v1(22.23,3.17) v1(22.73,2.03) v1(22.86,7.62) v1(23.5,5.84) v1(23.5,3.3) v1(23.62,66.04) v1(23.62,63.37) v1(23.75,86.23) v1(23.75,58.17) v1(23.88,56.39) v1(24.38,39.62) v1(24.89,22.1) v1(24.89,18.29) v1(25.02,2.41) v1(26.04,0.89) v1(26.16,66.04) v1(26.16,63.37) v1(26.16,22.1) v1(26.16,20.83) v1(26.16,19.56) v1(26.16,18.29) v1(26.29,86.23) v1(26.29,83.69) v1(26.42,42.93) v1(26.54,7.62) v1(26.54,4.19) v1(27.05,78.87) v1(27.05,76.96) v1(27.05,75.06) v1(27.18,18.29) v1(27.43,20.83) v1(28.57,75.06) v1(28.57,0.89) v1(28.7,66.04) v1(28.7,63.37) v1(28.7,22.1) v1(28.7,20.83) v1(28.7,19.56) v1(28.7,5.71) v1(28.7,2.54) v1(29.08,47.75) v1(29.34,79.76) v1(29.72,51.31) v1(30.48,4.06) v1(30.73,51.31) v1(30.73,7.62) v1(31.11,0.89) v1(31.24,66.04) v1(31.24,63.37) v1(31.37,86.23) v1(31.37,83.69) v1(31.62,51.31) v1(31.62,47.75) v1(31.75,26.8) v1(31.75,25.53) v1(32.26,5.84) v1(32.26,2.29) v1(33.4,4.06) v1(33.53,79.63) v1(33.66,0.89) v1(33.91,86.23) v1(33.91,83.69) v1(34.42,49.28) v1(36.2,2.41) v1(36.2,0.89) v1(36.45,58.17) v1(36.45,56.52) v1(36.45,54.48) v1(36.45,52.7) v1(36.83,63.37) v1(37.21,66.04) v1(38.73,26.92) v1(38.73,2.41) v1(38.73,0.89) v1(38.86,66.04) v1(38.99,86.23) v1(38.99,83.69) v1(38.99,63.37) v1(39.37,28.83) v1(39.75,47.62) v1(41.27,2.41) v1(41.27,0.89) v1(41.4,66.04) v1(41.4,17.78) v1(41.53,86.23) v1(41.53,83.69) v1(41.53,63.37) v1(41.91,20.83) v1(42.04,51.44) v1(42.29,47.62) v1(43.05,51.44) v1(43.18,44.32) v1(43.56,5.71) v1(43.81,2.41) v1(43.81,0.89) v1(43.94,66.04) v1(43.94,51.44) v1(44.07,86.23) v1(44.07,83.69) v1(44.07,63.37) v1(44.83,47.62) v1(45.72,21.08) v1(46.35,2.41) v1(46.35,0.89) v1(46.48,66.04) v1(46.61,86.23) v1(46.61,83.69) v1(46.99,37.59) v1(47.5,44.45) v1(47.88,53.59) v1(47.88,49.02) v1(48.77,79.63) v1(48.9,0.89) v1(49.02,66.04) v1(49.02,63.37) v1(49.15,86.23) v1(49.15,83.69) v1(49.15,13.46) v1(49.15,8.51) v1(49.66,19.05) v1(50.16,6.73) v1(50.67,68.07) v1(50.8,39.5) v1(50.8,16) v1(51.31,79.63) v1(51.44,0.89) v1(51.56,66.04) v1(51.56,63.37) v1(51.56,58.17) v1(51.56,55.63) v1(51.69,86.23) v1(51.69,83.69) v1(51.69,8.51) v1(52.96,77.98) v1(52.96,76.07) v1(53.21,68.07) v1(53.34,42.67) v1(53.34,16) v1(53.98,0.89) v1(54.1,66.04) v1(54.1,63.37) v1(54.1,60.71) v1(54.1,58.17) v1(54.1,55.63) v1(54.1,53.85) v1(54.23,86.23) v1(54.23,83.69) v1(54.36,8.51) v1(55.63,76.07) v1(55.75,68.07) v1(56.01,4.57) v1(56.13,11.43) v1(56.39,72.9) v1(56.39,70.36) v1(56.52,0.89) v1(56.77,86.23) v1(56.77,83.69) v1(56.77,81.15) v1(56.77,8.51) v1(58.29,72.9) v1(58.29,70.36) v1(58.29,68.2) v1(58.67,4.57) v1(58.8,81.53) v1(58.8,11.43) v1(59.05,0.89) v1(59.18,66.04) v1(59.31,86.23) v1(59.31,83.69) v1(59.31,78.61) v1(59.31,8.51) v1(60.83,72.9) v1(60.83,70.36) v1(60.83,68.2) v1(60.83,58.17) v1(61.21,7.37) v1(61.21,4.83) v1(61.59,0.89) v1(61.72,66.04) v1(61.72,63.37) v1(61.72,60.71) v1(61.85,86.23) v1(61.85,83.69) v1(63.63,78.61) v1(63.75,12.45) v1(63.75,9.91) v1(63.75,7.37) v1(63.75,4.83) v1(64.14,0.89) v1(64.26,66.04) v1(64.26,63.37) v1(64.26,60.71) v1(64.39,86.23) v1(64.77,15.11) v1(66.17,78.61) v1(66.29,12.45) v1(66.29,9.91) v1(66.42,16.89) v1(66.67,20.07) v1(66.67,0.89) v1(66.8,66.17) v1(66.8,63.37) v1(66.8,60.71) v1(66.93,86.23) v1(68.71,78.61) v1(68.71,76.07) v1(68.71,73.53) v1(68.83,12.45) v1(68.83,9.91) v1(68.96,6.99) v1(69.09,86.23) v1(69.09,83.95) v1(69.09,81.41) v1(69.09,66.17) v1(69.09,63.25) v1(69.09,0.89) v1(69.22,71.25) v1(69.22,68.71) v1(69.22,60.71) v1(69.22,58.17) v1(69.22,55.63) v1(69.22,53.09) v1(69.22,50.55) v1(69.22,48.01) v1(69.22,45.47) v1(69.22,42.93) v1(69.22,40.39) v1(69.22,37.85) v1(69.22,35.31) v1(69.22,32.77) v1(69.22,30.23) v1(69.22,27.69) v1(69.22,25.15) v1(69.22,22.61) v1(69.22,20.07) v1(69.22,17.53) v1(69.22,14.99) v1(69.22,4.83) v1(69.22,2.29)
DL_3V3: length 8.3
  TOP w0.254: U17.29 15.82,77.27 v1(15.75,77.34) ; v1(20.07,73.91) 19.95,74.03 U17.6
  TOP w0.381: D9.A v1(16.76,81.15) ; v1(24.13,68.83) 24.09,68.87 D7.A ; v1(24.13,73.41) 24.09,73.44 D8.A
  BOTTOM w0.381: R59.1 20.07,72.85 v1(20.07,73.91) ; 23.67,75.62 R68.2
DUSBD+: length 13.8
  TOP w0.145: USB1.3 32.13,80.64 32.24,80.54 32.24,79.87 v1(32,79.63) 32.14,79.5 32.14,79.29 R57.1
  TOP w0.17: v1(34.29,74.55) 34.54,74.3 R58.1
  BOTTOM w0.145: R57.1 32.14,79.29 32.14,79.5 v1(32,79.63)
  BOTTOM w0.16: v1(32,79.63) 32,79.88 32.38,80.26 33.66,80.26 34.04,79.88 34.04,74.8 v1(34.29,74.55)
DUSBD-: length 4.7
  TOP w0.145: USB1.2 32.78,80.79 32.54,80.54 32.54,79.86 v1(32.77,79.63) 32.57,79.43 32.57,79.23 R54.1
  BOTTOM w0.145: v1(32.77,79.63) 32.57,79.43 32.57,79.23 R54.1
HXTAL1: length 5.6
  TOP w0.203: U9.4 25.7,15.79 25.53,15.62 C30.1 26.16,14.4 26.16,12.47 U11.1
HXTAL2: length 8.5
  TOP w0.203: U9.3 25.3,16.08 C29.2 24.89,14.4 24.89,13.08 25.45,12.52 25.45,11.35 U11.3
JL-3V3: length 7.6
  TOP w0.254: v1(40.77,70.36) 40.6,70.53 U15.36 ; v1(46.74,70.48) 46.78,70.53 U15.1 ; U15.48 46.57,68.12 v1(46.86,67.82) ; U15.24 41.06,76.37 v1(41.02,76.33) ; v1(46.86,74.55) 46.88,74.53 U15.9
  BOTTOM w0.381: 43.98,72.56 R52.2
JTCK: length 24
  TOP w0.17: J11.3 61.77,67.18 41.53,67.18 41.06,67.65 U15.37
JTMS: length 37
  TOP w0.17: U15.34 38.64,71.53 38.48,71.37 38.48,69.09 40.89,66.67 63.25,66.67 64.39,67.82 64.39,72.19 J11.1
LED: length 5.4
  TOP w0.17: U15.25 40.34,76.03 40.51,76.2 40.51,77.09 40.13,77.47 R55.1
LXTAL1: length 6.5
  TOP w0.203: X1.2 35.2,23.91 34.48,23.19 C26.1 33.37,23.17 R26.2 32.07,22.86 31.11,22.86 30.35,22.09 U9.25
LXTAL2: length 6.4
  TOP w0.203: X1.1 35.1,21.41 34.48,22.02 C27.1 33.37,22.05 R26.1 32.07,22.35 31.23,22.35 30.57,21.69 U9.24
NRST: length 3.1
  TOP w0.254: U15.7 47.08,73.53 46.96,73.41 v1(46.86,73.41)
  BOTTOM w0.381: C47.1 47.37,72.52 46.86,73.03 v1(46.86,73.41)
OSC1-IN: length 6.6
  TOP w0.203: U16.1 52.84,72.52 51.18,72.52 50.85,72.19 C48.1 49.82,72.53 U15.5
OSC1-OUT: length 4.3
  TOP w0.203: U15.6 49.97,73.03 C46.2 51.36,73.23 U16.3
OSC2-IN: length 8.1
  TOP w0.254: U17.4 18.95,73.12 19.23,72.85 C52.1 19.86,71.37 19.86,69.14 U21.1
OSC2-OUT: length 5.9
  TOP w0.254: U17.5 19.45,73.38 20.07,72.77 20.07,72.34 C51.2 20.45,71.96 20.45,70.38 U21.3
PA0: length 113.4
  TOP w0.17: v1(27.56,13.84) 27.56,13.97 26.1,15.43 U9.5 ; v1(38.86,44.07) 19.3,44.07 15.49,47.88 J4.3
  BOTTOM w0.17: U12.1 61.65,57.71 59.69,55.75 58.04,55.75 57.66,55.37 57.66,53.34 52.32,48.01 52.32,46.99 50.55,45.21 40.01,45.21 v1(38.86,44.07) 38.73,43.94 38.73,40.64 37.34,39.24 37.34,27.3 38.73,25.91 38.73,14.48 37.34,13.08 33.91,13.08 33.53,12.7 33.53,11.68 33.27,11.43 30.61,11.43 29.59,10.41 29.08,10.41 28.7,10.79 28.7,13.21 28.07,13.84 v1(27.56,13.84)
PA1: length 85.5
  TOP w0.17: U9.6 26.5,15.67 28.32,13.84 28.32,10.16 28.83,9.65 33.4,9.65 35.05,11.3 43.69,11.3 54.86,22.48 54.86,42.16 53.34,43.69 v1(53.34,45.85) ; J5.5 63.63,53.98 67.18,53.98 67.94,54.74 67.94,56.49 U12.2
  BOTTOM w0.17: v1(53.34,45.85) 56.9,49.4 J5.5
PA2: length 68.5
  TOP w0.17: v1(52.07,45.85) 52.07,42.29 53.34,41.02 53.34,25.02 42.16,13.84 33.27,13.84 32.51,14.61 30.48,14.61 28.5,16.59 U9.11 ; U12.3 63.42,55.17 60.2,51.94 J5.6
  BOTTOM w0.17: J5.6 58.17,51.94 v1(52.07,45.85)
PA3: length 82.7
  TOP w0.17: U9.10 28.1,16.48 30.61,13.97 32.38,13.97 33.27,13.08 42.93,13.08 54.36,24.51 54.36,41.15 v1(54.23,41.27) ; U12.4 66.73,55.19 65.53,56.39 62.99,56.39 59.82,53.21 58.42,53.21 57.91,52.7 57.91,45.97 58.29,45.59 60.07,45.59 60.71,44.96 60.71,40.89 59.05,39.24
  BOTTOM w0.17: 59.05,39.24 57.02,41.27 v1(54.23,41.27)
PA4: length 77.9
  TOP w0.17: U9.35 26.1,23.69 26.04,23.74 26.04,26.17 32.8,32.92 47.4,32.92 48.26,33.78 48.26,36.58 48.51,36.83 49.15,36.83 49.66,37.34 49.66,43.81 51.05,45.21 51.05,46.23 v1(50.16,47.12)
  BOTTOM w0.17: v1(50.16,47.12) 50.16,47.37 56.64,53.85 56.64,61.34 57.4,62.1 J5.10 61.59,59.56 64.64,59.56 65.53,58.67 65.53,53.98 U12.5
PA5: length 76.1
  TOP w0.17: v1(50.16,45.85) 49.21,44.89 49.21,37.51 49.04,37.34 48.26,37.34 47.88,36.96 47.88,34.29 46.96,33.37 32.61,33.37 25.7,26.46 U9.36 ; J5.9 66.67,59.56 68.45,57.78 68.45,54.1 66.98,52.63 U12.6
  BOTTOM w0.17: J5.9 57.78,59.56 57.15,58.93 57.15,53.59 51.05,47.5 51.05,46.74 v1(50.16,45.85)
PA6: length 61.7
  TOP w0.17: J7.8 59.05,36.83 61.98,39.75 61.98,47.88 U12.7 ; v1(48.64,37.85) 48.13,37.85 47.5,37.21 47.5,34.67 46.65,33.82 32.3,33.82 25.3,26.82 U9.37
  BOTTOM w0.17: v1(48.64,37.85) 49.28,37.85 50.8,36.32 56.01,36.32 57.15,35.18 J7.8
PA7: length 74.1
  TOP w0.17: U12.8 65.46,48.82 63.8,48.82 62.87,47.88 62.87,39.62 60.96,37.72 60.96,29.46 J7.5 ; v1(46.99,36.32) 46.99,34.92 46.33,34.27 32.11,34.27 24.9,27.06 U9.38
  BOTTOM w0.17: J7.5 55.12,27.56 49.4,33.27 48.26,33.27 46.99,34.54 v1(46.99,36.32)
PA8: length 82
  TOP w0.152: U9.26 30.07,22.49 30.35,22.77 30.35,23.5 v1(31.11,24.26)
  TOP w0.17: v1(31.11,24.26) 31.37,24.51 32.26,24.51 37.08,29.34 50.29,29.34 52.45,31.5 52.45,40.13 v1(51.44,41.15)
  BOTTOM w0.17: v1(51.44,41.15) 53.21,39.37 57.28,39.37 58.55,38.1 59.56,38.1 60.2,38.73 60.2,41.66 61.47,42.93 61.47,44.83 U12.9 ; J6.6 11.68,17.4 18.8,24.51 22.48,24.51 23.24,25.27 27.94,25.27 29.46,23.75 30.61,23.75 v1(31.11,24.26)
PA9: length 80.8
  TOP w0.152: U9.27 29.3,23.71 v1(29.84,24.26)
  TOP w0.17: v1(29.84,24.26) 29.84,24.38 30.48,25.02 32,25.02 36.77,29.79 49.85,29.79 51.94,31.88 51.94,39.62 v1(51.44,40.13)
  BOTTOM w0.17: J6.5 11.94,19.94 17.14,25.15 21.84,25.15 22.73,26.04 28.07,26.04 v1(29.84,24.26) ; U12.10 65.41,46.23 63.75,46.23 61.98,44.45 61.98,42.55 60.71,41.27 60.71,38.35 60.01,37.66 57.98,37.66 56.9,38.73 52.83,38.73 v1(51.44,40.13)
PA10: length 74.9
  TOP w0.17: v1(51.44,38.86) 51.44,32.13 49.54,30.23 36.06,30.23 31.99,26.16 31.11,26.16 v1(30.48,25.53) 29.97,25.53 28.9,24.45 U9.28
  BOTTOM w0.17: v1(51.44,38.86) 52.2,38.1 56.64,38.1 57.53,37.21 60.45,37.21 61.21,37.97 61.21,41.02 62.48,42.29 62.48,43.31 U12.11 ; J6.4 14.48,26.16 21.72,26.16 22.35,26.8 28.32,26.8 29.59,25.53 v1(30.48,25.53)
PA11: length 78.6
  TOP w0.17: U9.29 28.5,24.82 v1(30.48,26.8) 30.86,26.8 31.44,27.38 32.08,27.38 35.38,30.68 49.22,30.68 50.93,32.38 50.93,38.1 v1(50.16,38.86)
  BOTTOM w0.17: U12.12 65.41,43.69 63.75,43.69 62.99,42.93 62.99,42.04 61.85,40.89 61.85,37.47 61.15,36.77 57.15,36.77 56.32,37.59 51.44,37.59 v1(50.16,38.86) ; v1(30.48,26.8) 29.46,26.8 28.58,27.69 13.46,27.69 J6.3
PA12: length 74.3
  TOP w0.17: v1(50.16,37.85) 50.42,37.59 50.42,32.51 49.04,31.13 34.81,31.13 v1(31.75,28.07) 31.24,28.07 30.48,27.3 30.1,27.3 28.1,25.3 U9.30
  BOTTOM w0.17: v1(31.75,28.07) 31.11,27.43 29.97,27.43 28.96,28.45 11.68,28.45 J6.2 ; v1(50.16,37.85) 51.05,36.96 56.26,36.96 56.9,36.32 61.59,36.32 62.36,37.08 62.36,40.64 U12.13
PA13: length 75.4
  TOP w0.17: U9.31 27.7,25.67 30.1,28.07 v1(30.48,28.07) 33.99,31.58 48.85,31.58 49.78,32.51 v1(49.78,36.2)
  BOTTOM w0.17: v1(30.48,28.07) 29.21,29.34 11.56,29.34 J6.1 ; U12.14 65.41,41.15 65.41,39.12 64.9,38.61 63.63,38.61 62.99,37.97 62.99,36.2 60.71,33.91 57.28,33.91 55.5,35.69 50.29,35.69 v1(49.78,36.2)
